# EAGLE board Sprite_Sail_60x60cm (EAGLE 9.0.0), part 1 of 2
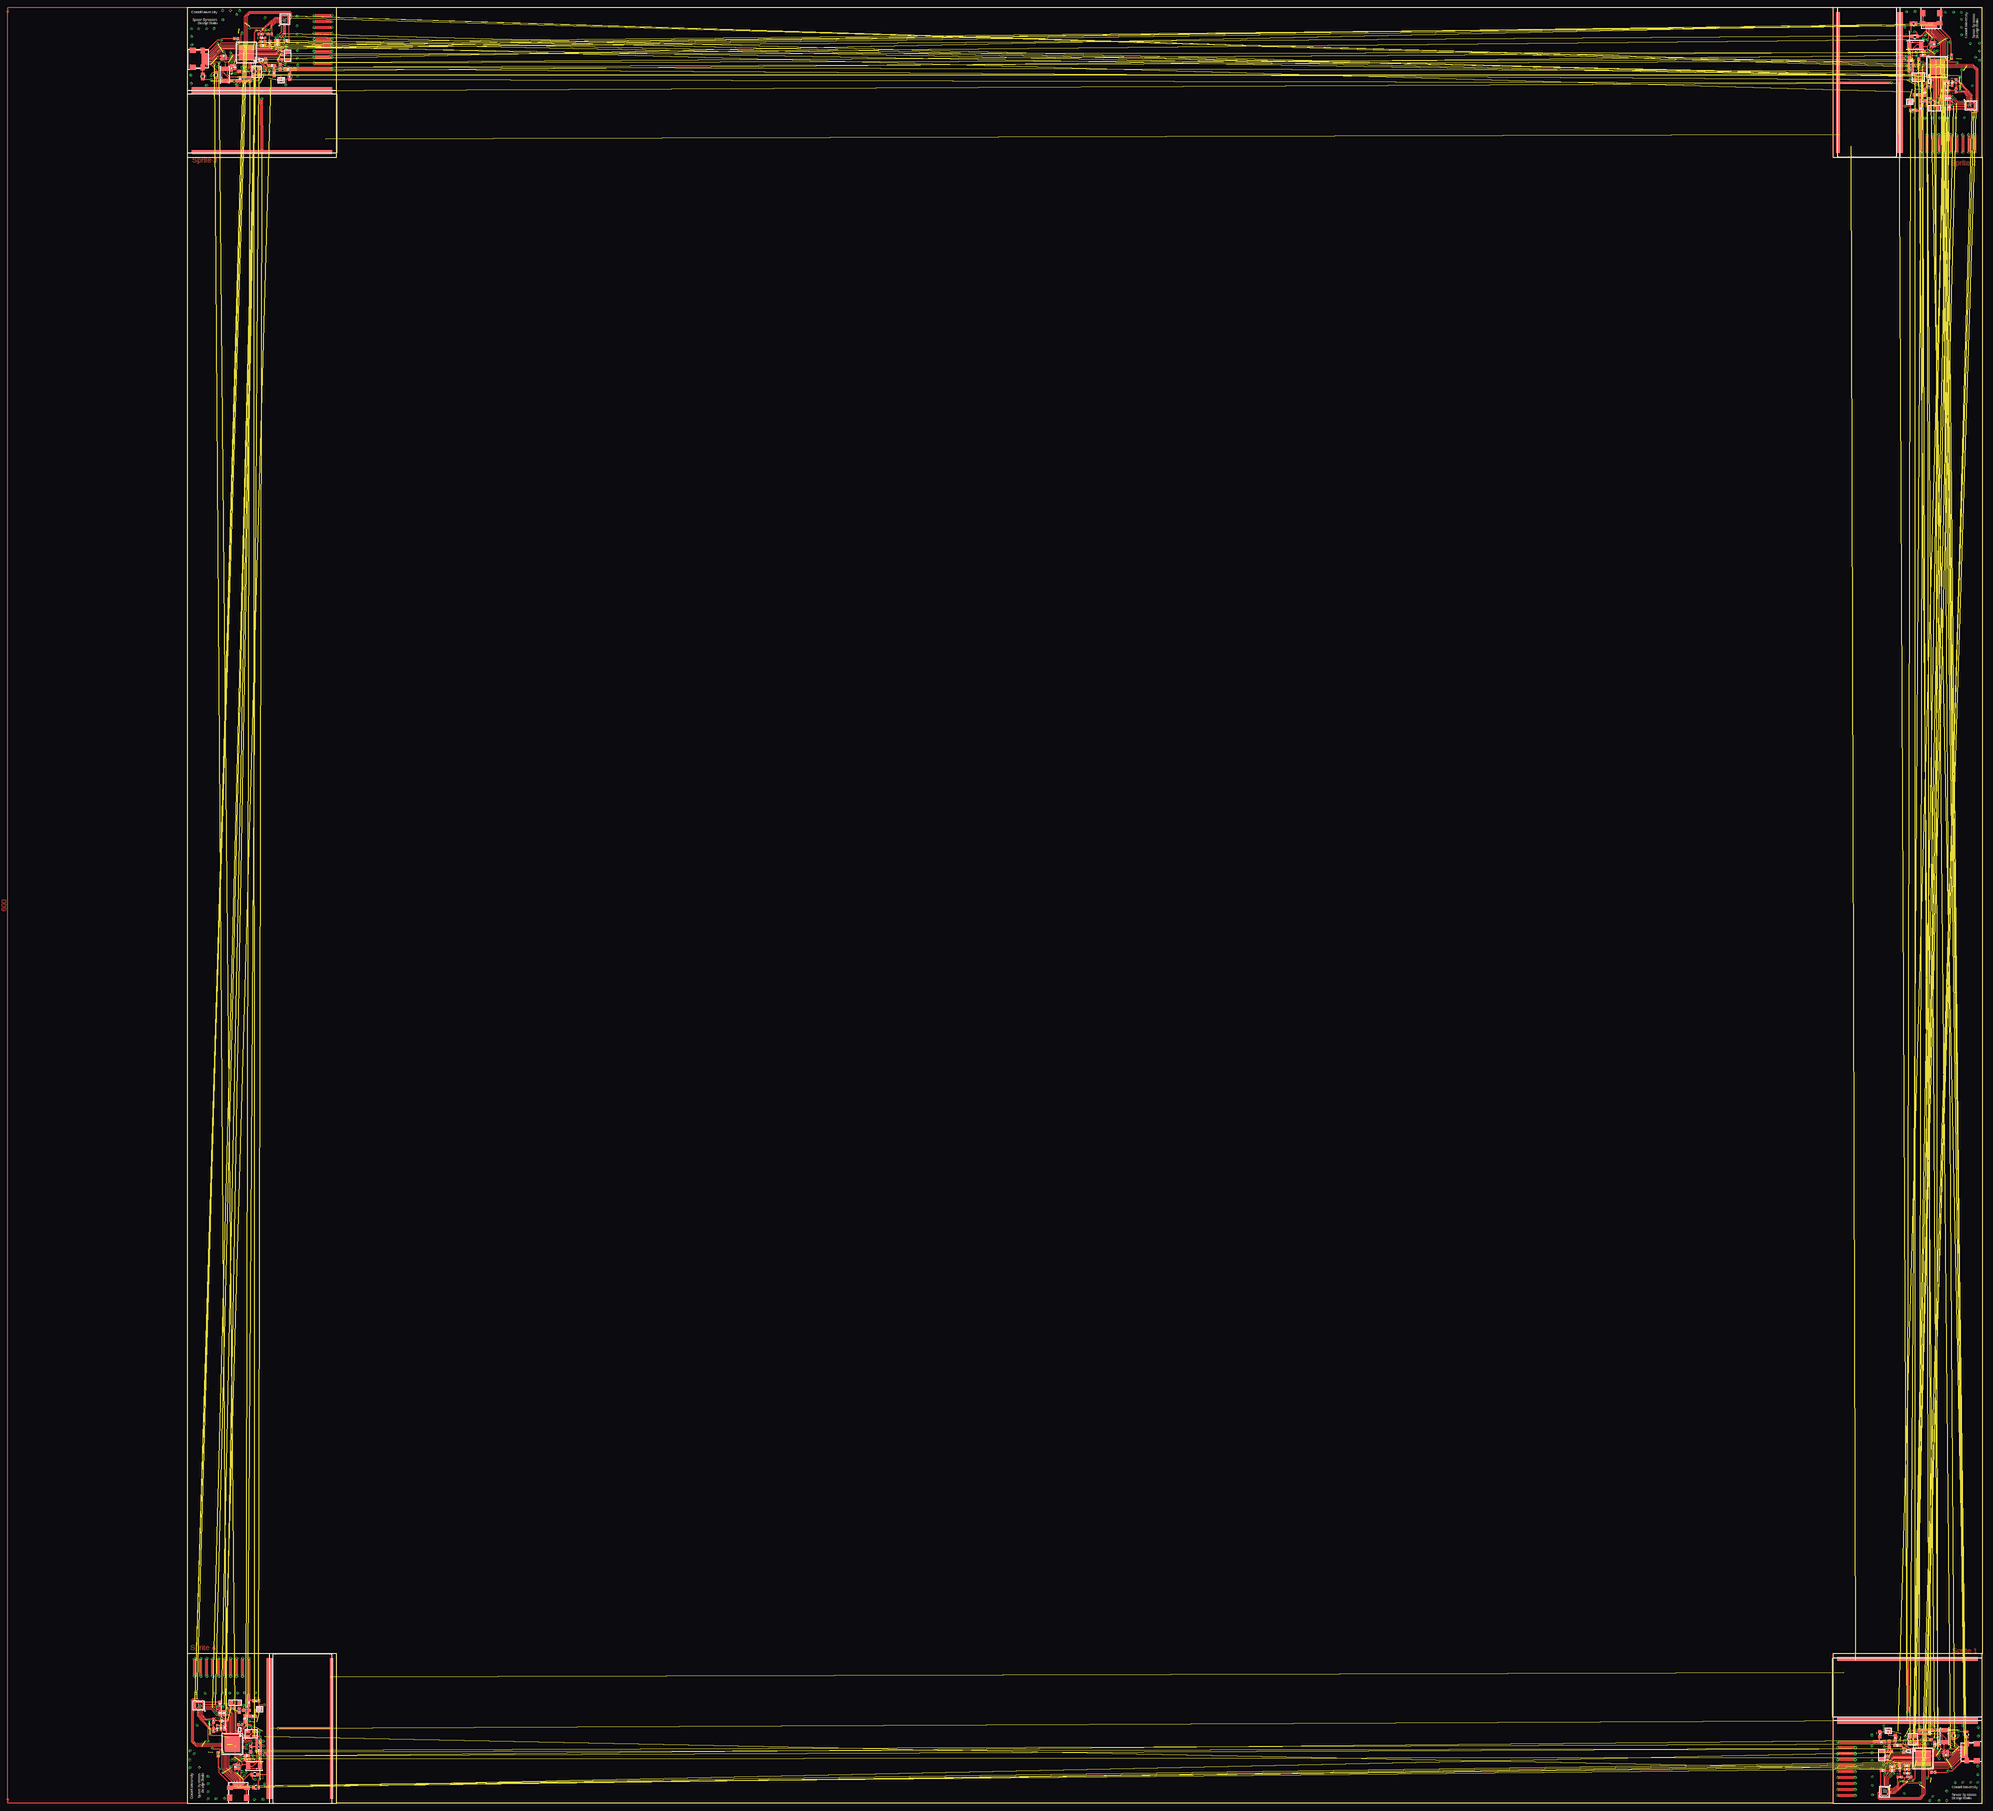
[diagram p0: board, top side]
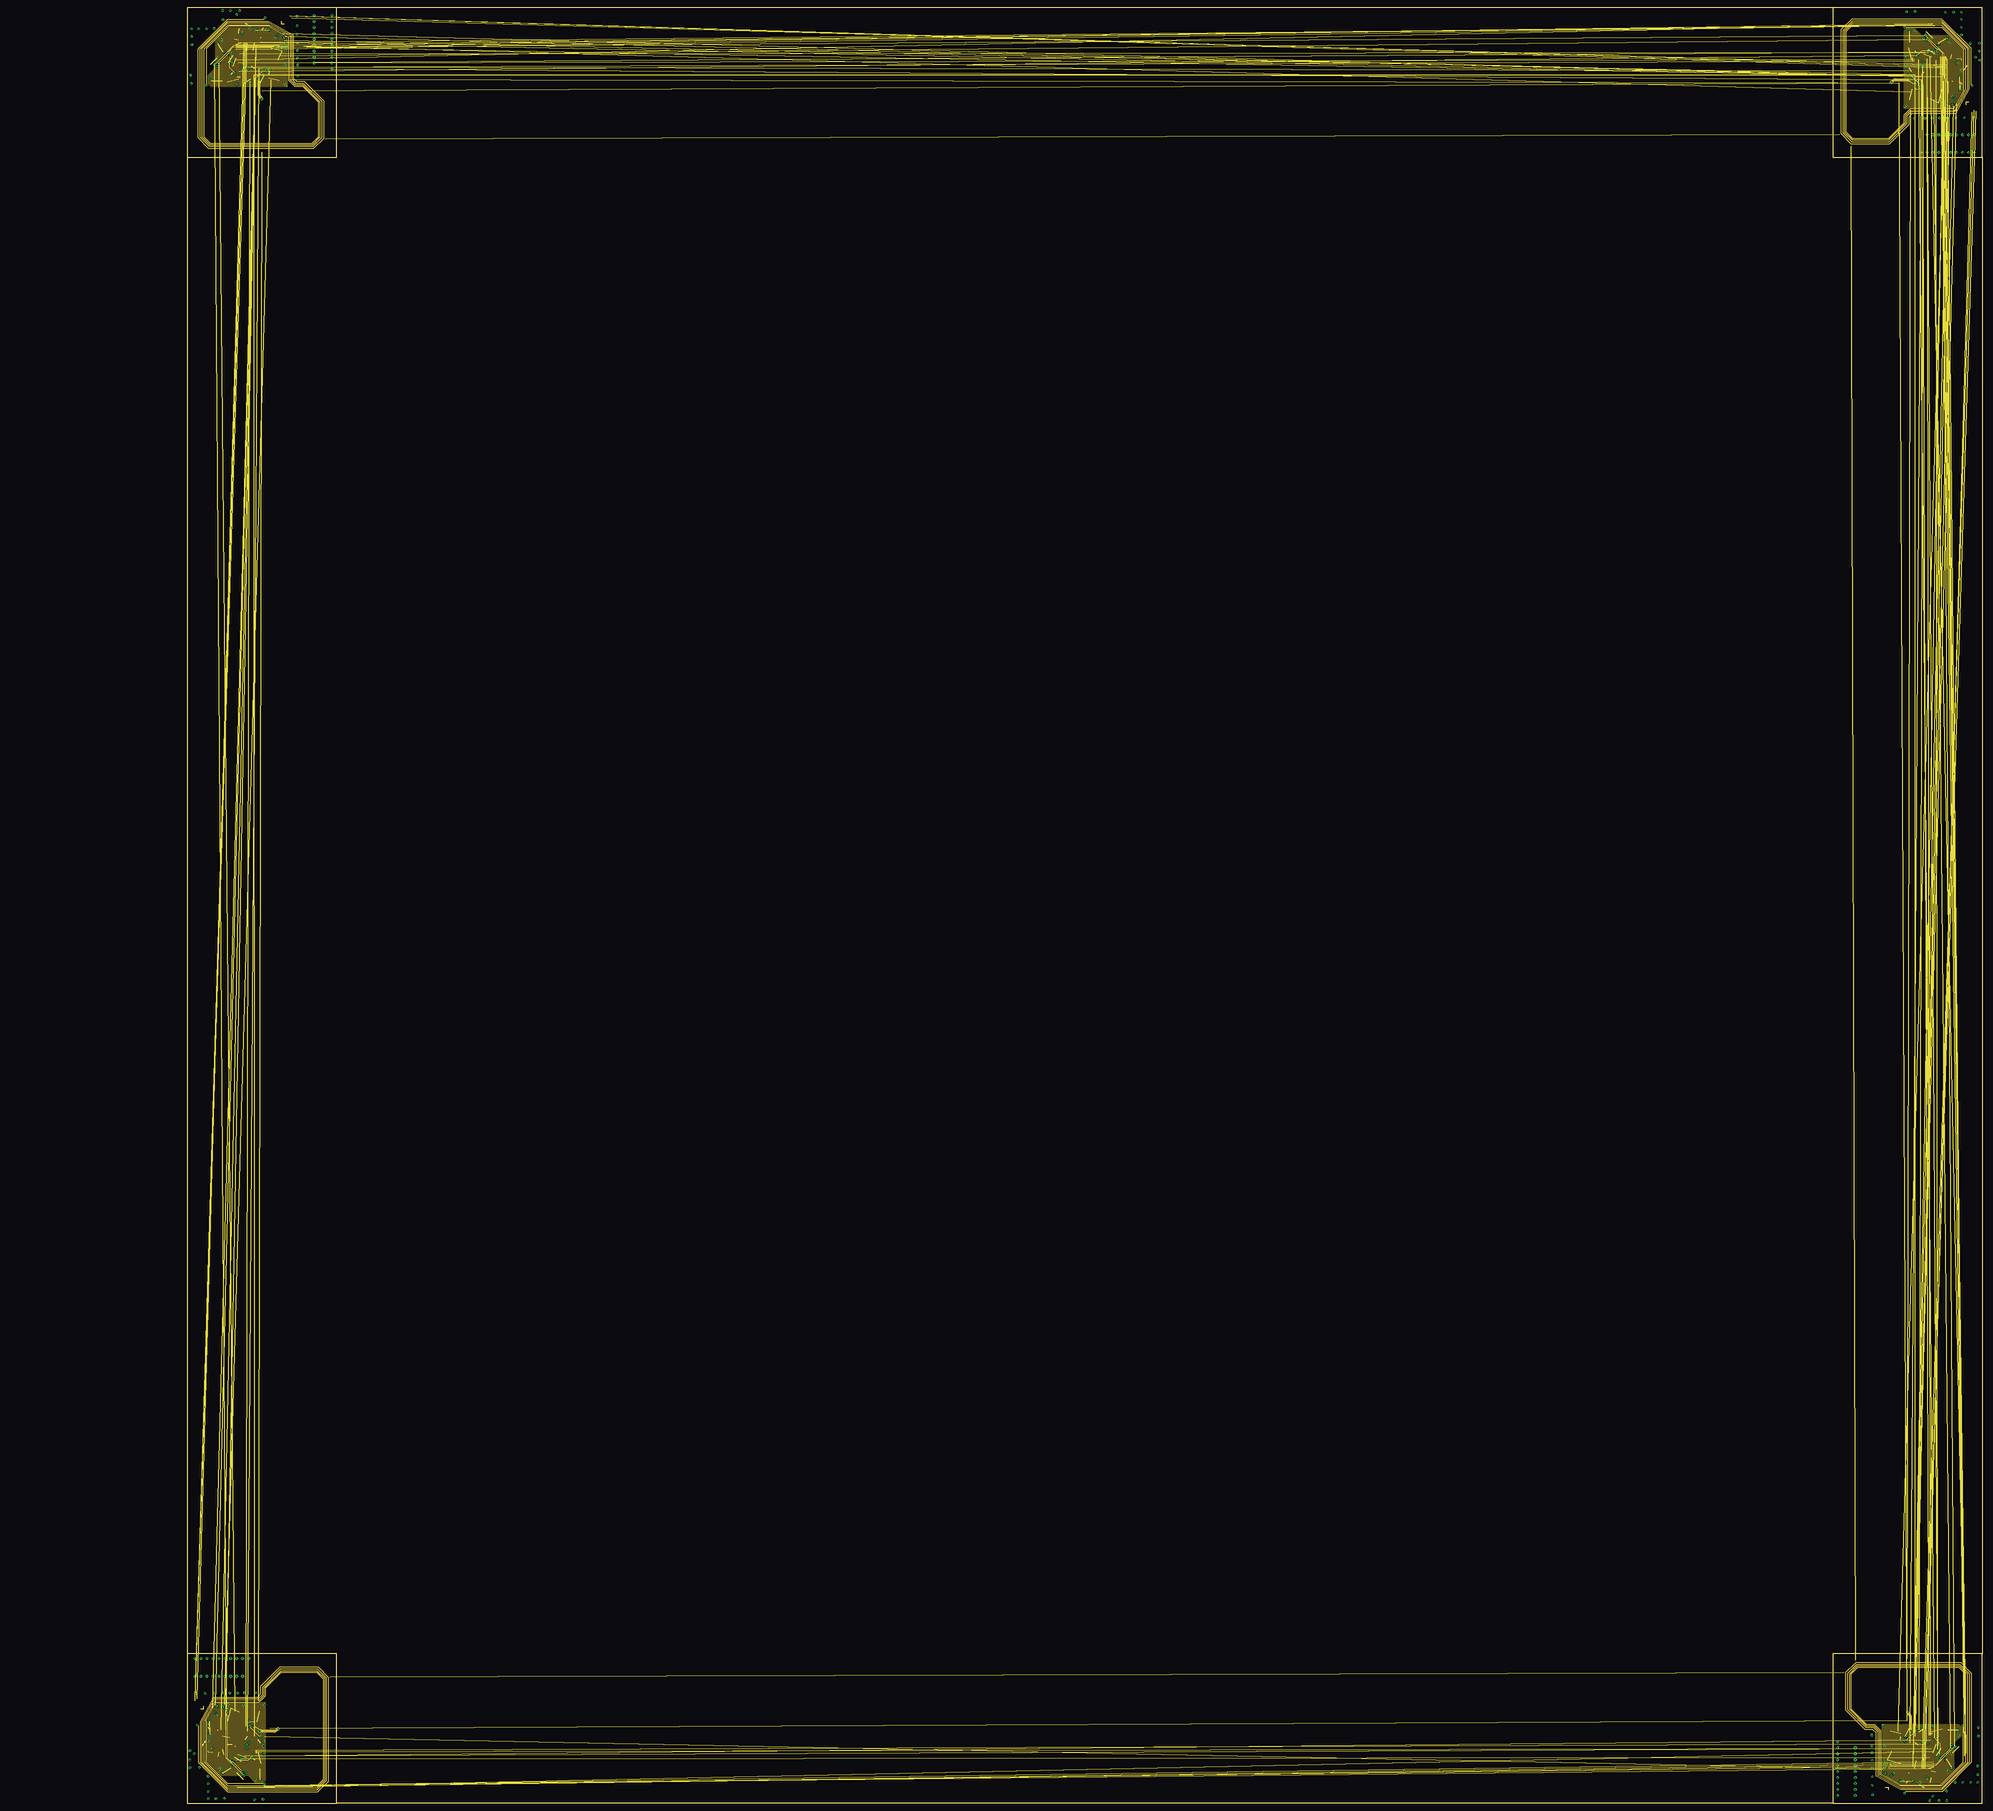
[diagram p1: board, inner layer Route2]
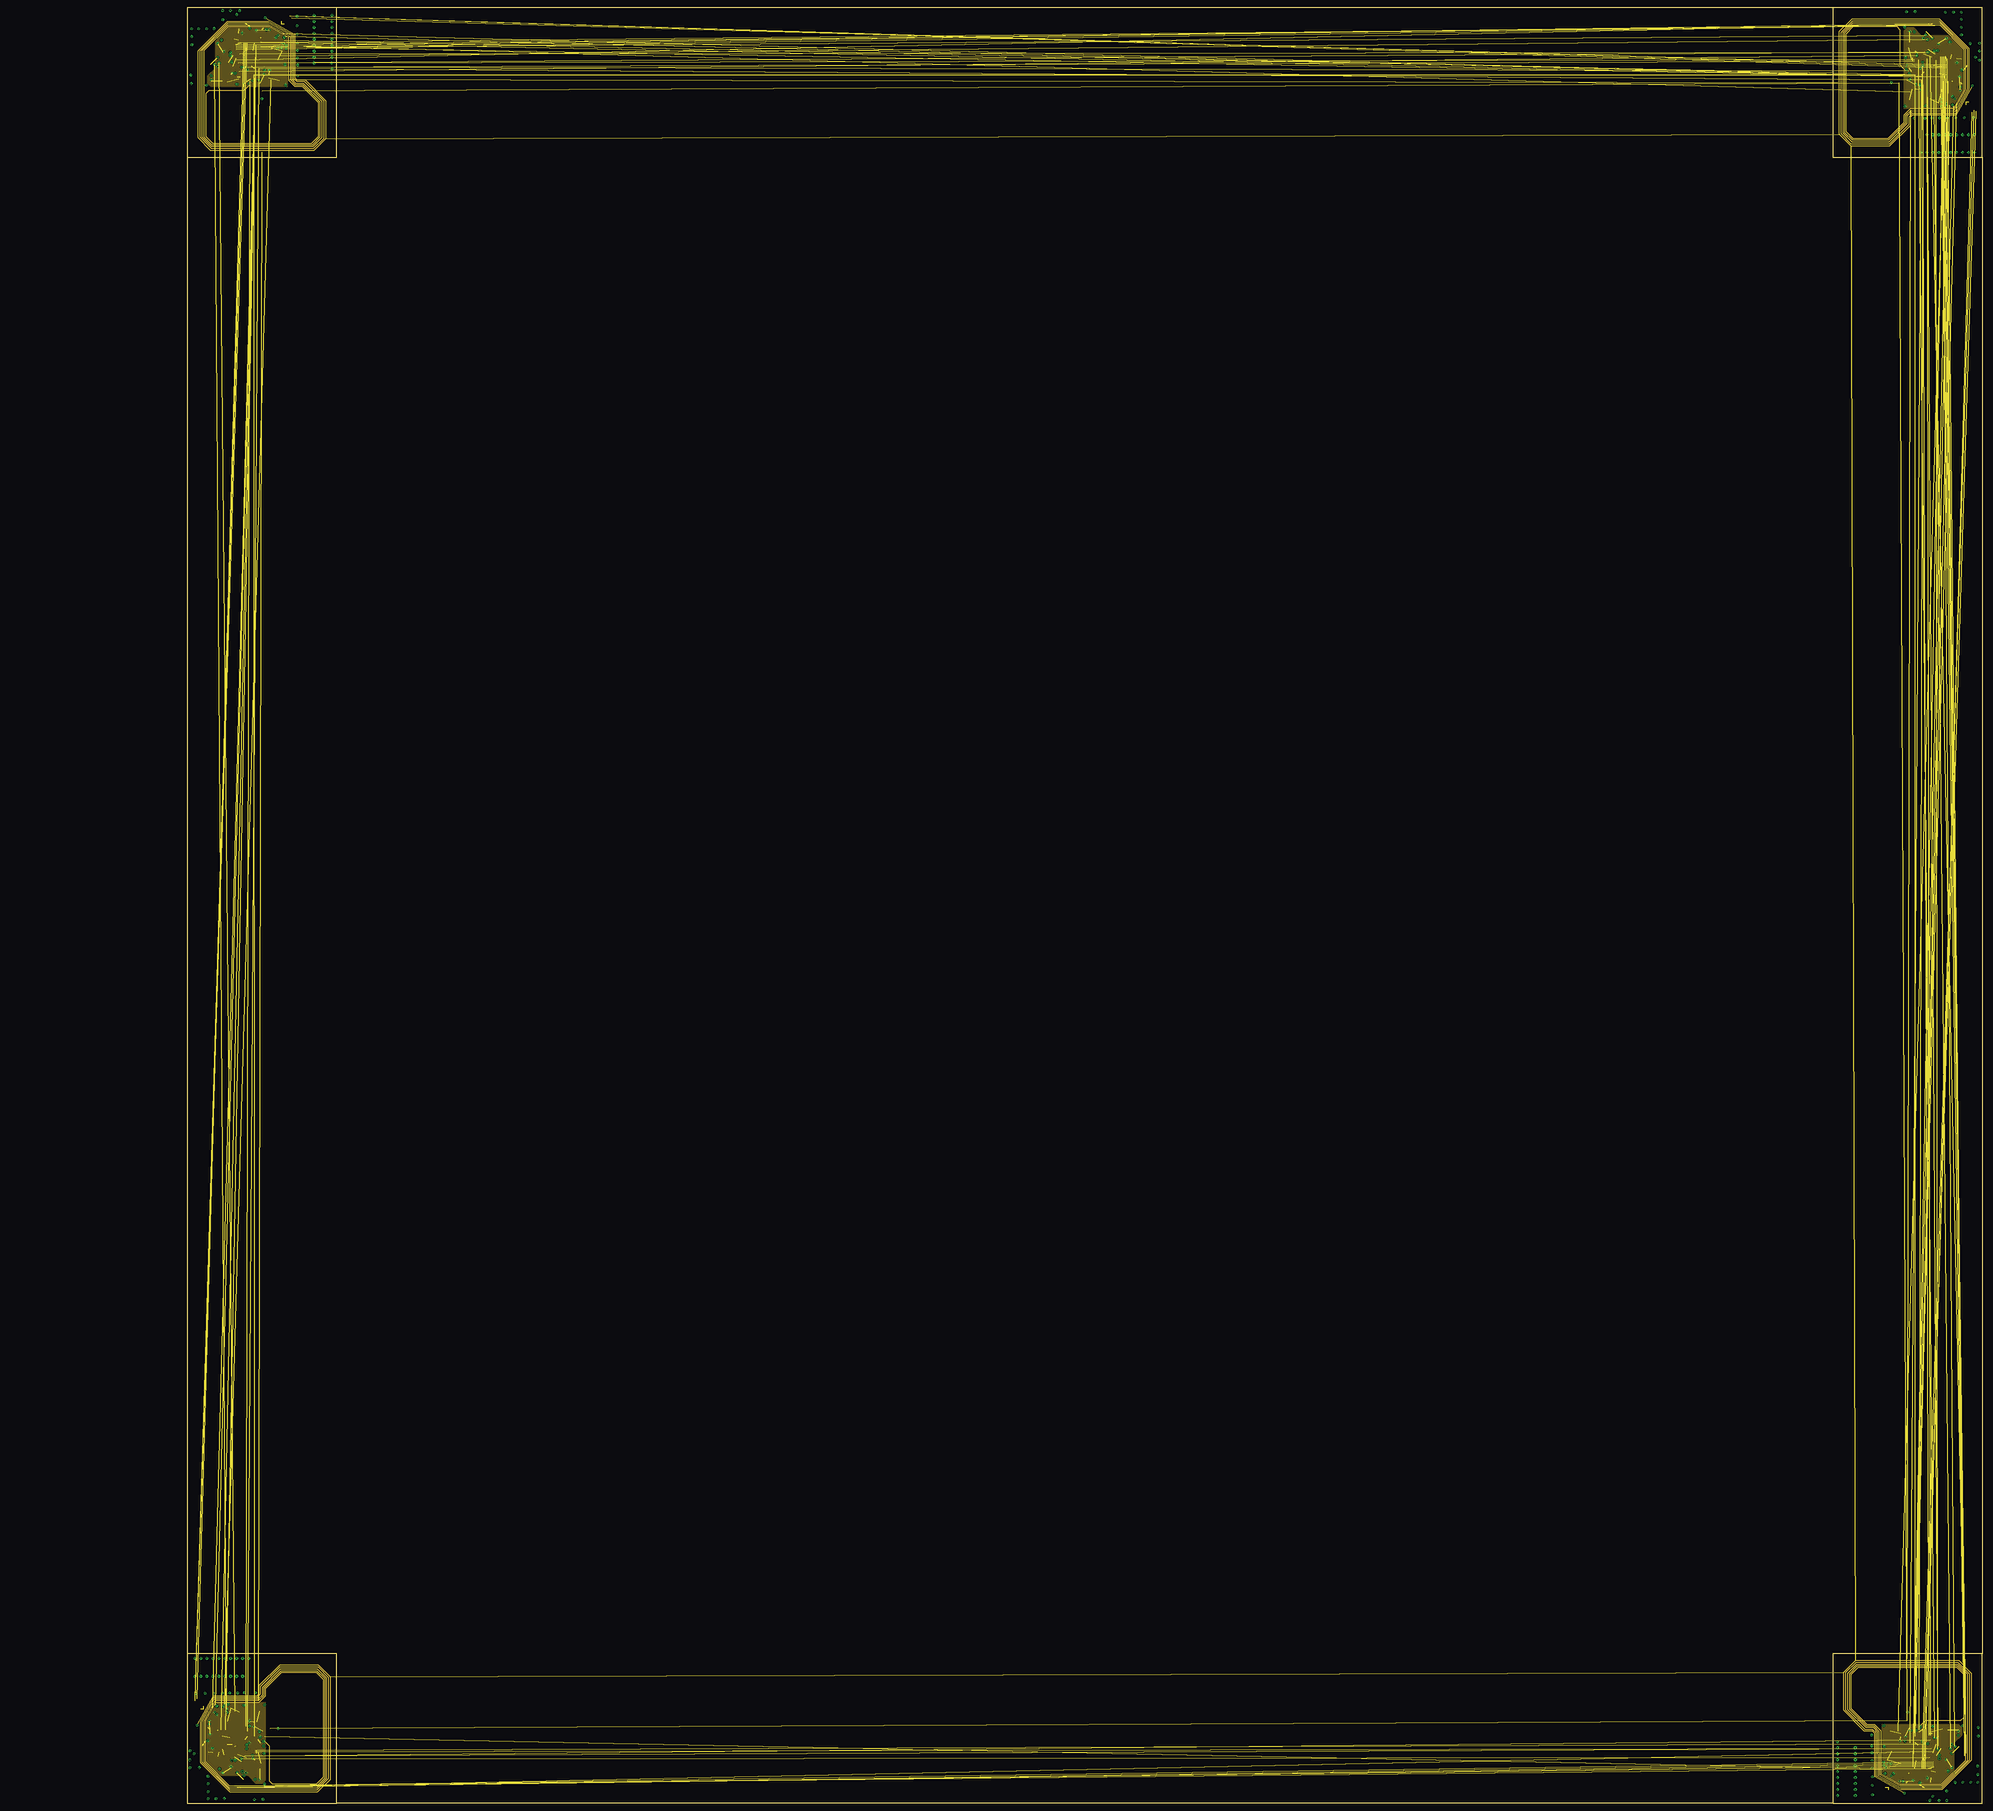
[diagram p2: board, inner layer Route15]
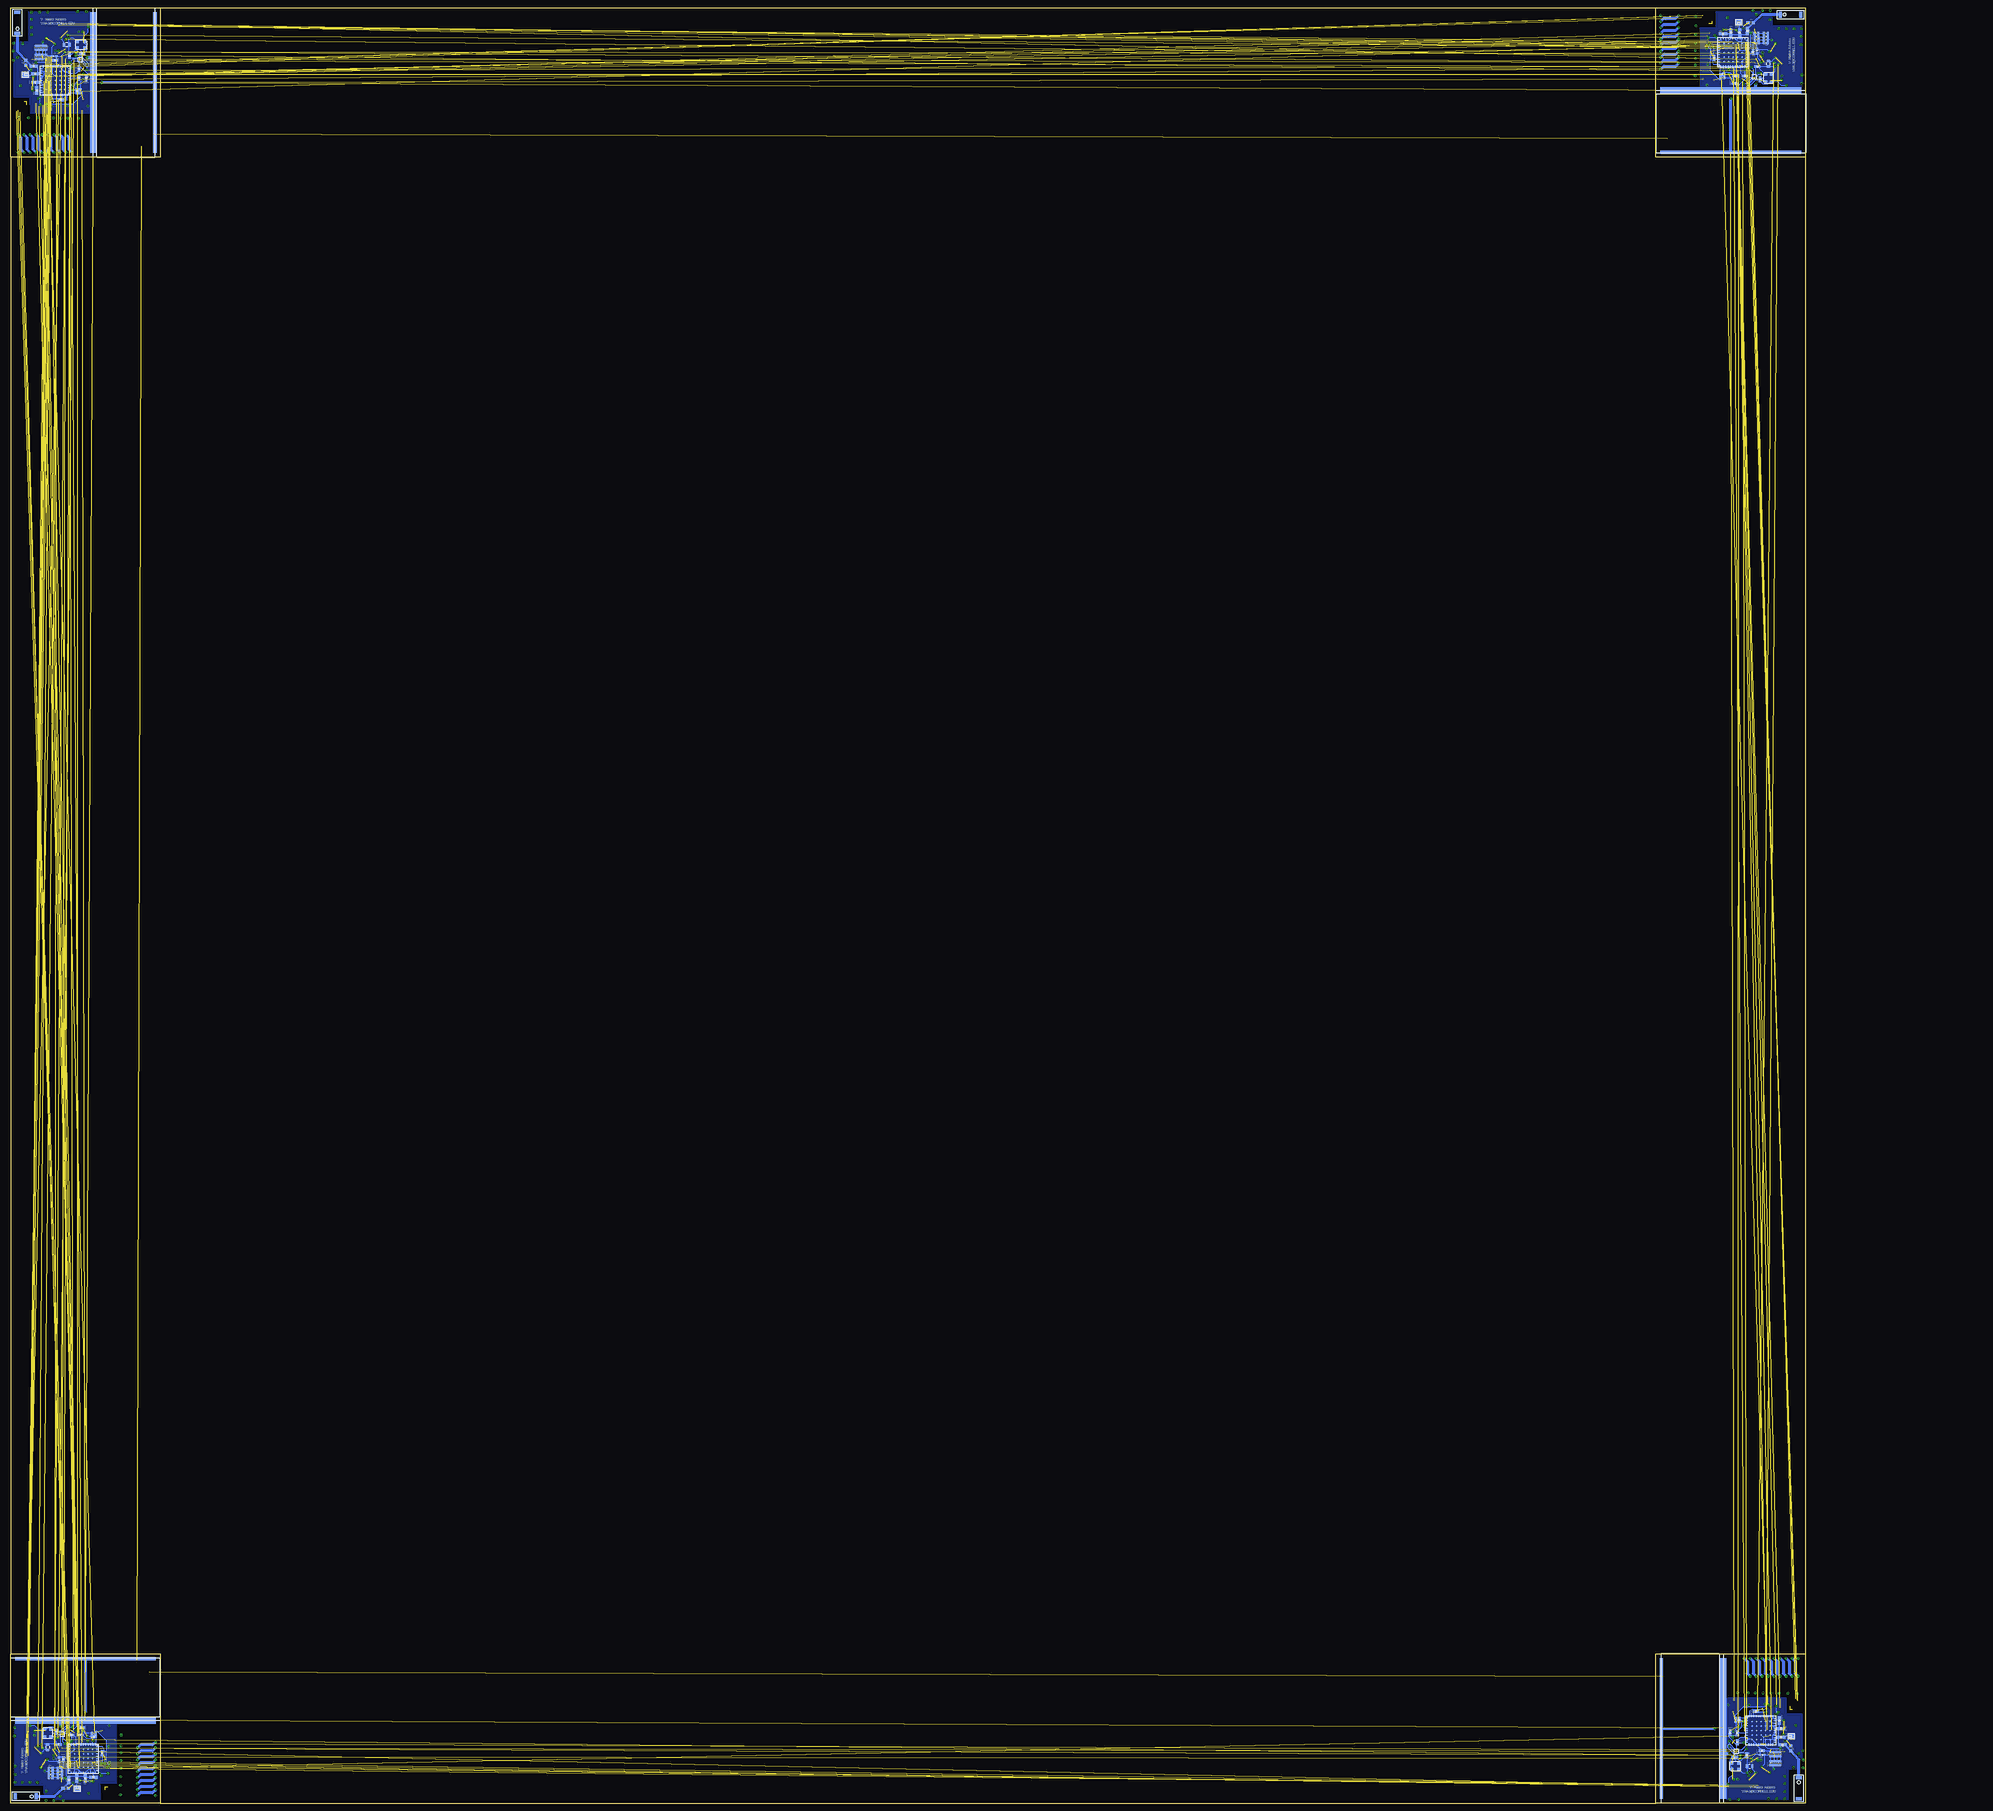
[diagram p3: board, bottom side, seen from below]

Size 600 x 600 mm. Coordinates in mm from the lower left corner, seen from the top.
Outline: 550,600 50,600
Outline: 0,550 0,50
Outline: 550,0 50,0
Outline: 600,550 600,50
Outline: 550,0 600,0 600,50
Outline: 600,50 550,50 550,0
Outline: 600,550 600,600 550,600
Outline: 550,600 550,550 600,550
Outline: 50,600 0,600 0,550
Outline: 0,550 50,550 50,600
Outline: 0,50 0,0 50,0
Outline: 50,0 50,50 0,50
Copper layers (1*16): Top 0.035mm / dielectric 1.5mm / Bottom 0.035mm
Design rules "default": minimum track width 6mil, minimum drill 0.35mm, track to track 6mil, track to pad 6mil, pad to pad 6mil, via to via 6mil, smd to smd 6mil, copper to edge 40mil, drill to drill 6mil, minimum pad ring 10mil, minimum via ring 8mil, stop-mask expansion 4mil, vias tented up to drill 0mil, thermal gap 10mil

## Footprints (pad centres in the part's own frame; a part is rotated, then mirrored left to right if it is on the bottom)
FC-135 = smd 1 x 1.8: P1 -1.25,0; P2 1.25,0
JOHANSON_BALUN = smd 0.45 x 0.25: 1 -0.4,0.5; 2 -0.4,0; 3 -0.4,-0.5; 4 0.4,-0.5; 5 0.4,0; 6 0.4,0.5
0402-CAP = smd 0.7 x 0.9: 1 -0.65,0; 2 0.65,0
0603-CAP = smd 1.1 x 1: 1 -0.85,0; 2 0.85,0
0805 = smd 0.8 x 1.2: 1 -0.9,0; 2 0.9,0
ALTA_CELL = smd 47 x 2.2: + 0,10.9 | smd 47 x 1.1: - 0,-9.65
VENUS838FLPX = smd 0.7 x 0.36: 1 -4.69,4; 2 -4.69,3.2; 3 -4.69,2.4; 4 -4.69,1.6; 5 -4.69,0.8; 6 -4.69,0; 7 -4.69,-0.8; 8 -4.69,-1.6; 9 -4.69,-2.4; 10 -4.69,-3.2; 11 -4.69,-4; 23 4.69,-4; 24 4.69,-3.2; 25 4.69,-2.4; 26 4.69,-1.6; 27 4.69,-0.8; 28 4.69,0; 29 4.69,0.8; 30 4.69,1.6; 31 4.69,2.4; 32 4.69,3.2; 33 4.69,4 | smd 0.36 x 0.7: 12 -4,-4.69; 13 -3.2,-4.69; 14 -2.4,-4.69; 15 -1.6,-4.69; 16 -0.8,-4.69; 17 0,-4.69; 18 0.8,-4.69; 19 1.6,-4.69; 20 2.4,-4.69; 21 3.2,-4.69; 22 4,-4.69; 34 4,4.69; 35 3.2,4.69; 36 2.4,4.69; 37 1.6,4.69; 38 0.8,4.69; 39 0,4.69; 40 -0.8,4.69; 41 -1.6,4.69; 42 -2.4,4.69; 43 -3.2,4.69; 44 -4,4.69 | smd 0.6 x 0.6: 45 -3,3; 46 -3,1.5; 47 -3,0; 48 -3,-1.5; 49 -3,-3; 50 -1.5,3; 51 -1.5,1.5; 52 -1.5,0; 53 -1.5,-1.5; 54 -1.5,-3; 55 0,3; 56 0,1.5; 57 0,0; 58 0,-1.5; 59 0,-3; 60 1.5,3; 61 1.5,1.5; 62 1.5,0; 63 1.5,-1.5; 64 1.5,-3; 65 3,3; 66 3,1.5; 67 3,0; 68 3,-1.5; 69 3,-3
LGA24-8X4 = smd 0.27 x 0.45: 1 -1.505,1.225; 6 -1.505,-1.225; 7 -1.075,-1.225; 8 -0.645,-1.225; 9 -0.215,-1.225; 10 0.215,-1.225; 11 0.645,-1.225; 12 1.075,-1.225; 13 1.505,-1.225; 18 1.505,1.225; 19 1.075,1.225; 20 0.645,1.225; 21 0.215,1.225; 22 -0.215,1.225; 23 -0.645,1.225; 24 -1.075,1.225 | smd 0.45 x 0.27: 2 -1.475,0.645; 3 -1.475,0.215; 4 -1.475,-0.215; 5 -1.475,-0.645; 14 1.475,-0.645; 15 1.475,-0.215; 16 1.475,0.215; 17 1.475,0.645
0603 = smd 1.1 x 1: 1 -0.85,0; 2 0.85,0
LED-0603 = smd 0.8 x 0.8: A 0,-0.75; C 0,0.75
ALS-PT19 = smd 0.8 x 0.8: C -0.75,0; E 0.75,0
CC1310 = smd 0.7 x 0.3: 1 -3.35,2.75; 2 -3.35,2.25; 3 -3.35,1.75; 4 -3.35,1.25; 5 -3.35,0.75; 6 -3.35,0.25; 7 -3.35,-0.25; 8 -3.35,-0.75; 9 -3.35,-1.25; 10 -3.35,-1.75; 11 -3.35,-2.25; 12 -3.35,-2.75; 25 3.35,-2.75; 26 3.35,-2.25; 27 3.35,-1.75; 28 3.35,-1.25; 29 3.35,-0.75; 30 3.35,-0.25; 31 3.35,0.25; 32 3.35,0.75; 33 3.35,1.25; 34 3.35,1.75; 35 3.35,2.25; 36 3.35,2.75 | smd 0.3 x 0.7: 13 -2.75,-3.35; 14 -2.25,-3.35; 15 -1.75,-3.35; 16 -1.25,-3.35; 17 -0.75,-3.35; 18 -0.25,-3.35; 19 0.25,-3.35; 20 0.75,-3.35; 21 1.25,-3.35; 22 1.75,-3.35; 23 2.25,-3.35; 24 2.75,-3.35; 37 2.75,3.35; 38 2.25,3.35; 39 1.75,3.35; 40 1.25,3.35; 41 0.75,3.35; 42 0.25,3.35; 43 -0.25,3.35; 44 -0.75,3.35; 45 -1.25,3.35; 46 -1.75,3.35; 47 -2.25,3.35; 48 -2.75,3.35 | smd 5.15 x 5.15: 49 0,0
0402-RES = smd 0.7 x 0.9: 1 -0.65,0; 2 0.65,0
0603-RES = smd 1.1 x 1: 1 -0.85,0; 2 0.85,0
TSX-3225 = smd 1.4 x 1.15: 1 -1.1,0.8; 2 1.1,0.8; 3 1.1,-0.8; 4 -1.1,-0.8
LV8417CS = smd 0.27 x 0.27: ENA -0.5,-0.5; IN1 0,-0.5; IN2 0.5,-0.5; OUT1 -0.5,0.5; OUT2 0.5,0.5; PGND 0,0.5; SGND 0,0; VCC -0.5,0; VM 0.5,0
JOHANSON_GPS_CHIP = smd 1 x 2: NC -3.5,0; SIG 3.5,0
PANASONIC_RECTIFIER = smd 1 x 1: C1 -0.95,1.2; C2 0.95,-1.2; GND 0.95,1.2; VCC -0.95,-1.2
PCB_ANTENNA = drill 0.35 pad 0.756: 1 -8.89,3.11; 2 -6.89,-2.89; 3 -6.89,3.11; 4 -4.89,-2.89; 5 -4.89,3.11; 6 -2.89,-2.89; 7 -2.89,3.11; 8 -0.89,-2.89; 9 -0.89,3.11; 10 1.11,-2.89; 11 1.11,3.11; 12 3.11,-2.89; 13 3.11,3.11; 14 5.11,-2.89; 15 5.11,3.11; 16 7.11,-2.89; 17 7.11,3.11; 18 9.11,-2.89; 19 9.11,3.11 | smd 1 x 1 bottom: ANTENNA -8.89,-9.39
MM5829-2700 = smd 0.4 x 1.7: GND1 -0.7,0; GND3 0.7,0 | smd 0.4 x 0.4: GND2 0,0.65 | smd 0.4 x 0.85: SIG 0,-0.425
L6920 = smd 0.45 x 1.35: 1 -0.975,-1.975; 2 -0.325,-1.975; 3 0.325,-1.975; 4 0.975,-1.975; 5 0.975,1.975; 6 0.325,1.975; 7 -0.325,1.975; 8 -0.975,1.975
HDMID = smd 0.23 x 0.85: 1 1.8,6.475; 3 1.4,6.475; 5 1,6.475; 7 0.6,6.475; 9 0.2,6.475; 11 -0.2,6.475; 13 -0.6,6.475; 15 -1,6.475; 17 -1.4,6.475; 19 -1.8,6.475 | smd 0.23 x 1: 2 1.6,5.25; 4 1.2,5.25; 6 0.8,5.25; 8 0.4,5.25; 10 0,5.25; 12 -0.4,5.25; 14 -0.8,5.25; 16 -1.2,5.25; 18 -1.6,5.25 | smd 1.8 x 1.38: FOOT1 -2.85,5.06; FOOT2 2.85,5.06 | smd 1.7 x 2: FOOT3 -2.85,1.7; FOOT4 2.85,1.7

## Placement (x,y rotation side)
32.1  FC-135  [FC-135]  566.41,16.05 90 top
32.2  FC-135  [FC-135]  33.59,583.95 270 top
32.3  FC-135  [FC-135]  583.95,566.41 180 top
32.5  FC-135  [FC-135]  16.05,33.59 0 top
BALUN1  JOHANSON_BALUN  [JOHANSON_BALUN]  575.37,17.48 90 top
BALUN2  JOHANSON_BALUN  [JOHANSON_BALUN]  24.63,582.52 270 top
BALUN3  JOHANSON_BALUN  [JOHANSON_BALUN]  582.52,575.37 180 top
BALUN5  JOHANSON_BALUN  [JOHANSON_BALUN]  17.48,24.63 0 top
C21  100 nF  [0402-CAP]  587.79,17.14 0 top
C24  100 nF  [0402-CAP]  586.67,11.72 180 bottom
C25  100 nF  [0402-CAP]  586.68,10.64 180 bottom
C27  100 nF  [0402-CAP]  586.69,9.56 180 bottom
C28  100 nF  [0402-CAP]  586.69,8.49 180 bottom
C29  22 uF  [0402-CAP]  583.64,11.73 0 bottom
C30  100 nF  [0402-CAP]  581.13,23.81 90 top
C31  22 uF  [0402-CAP]  580.04,23.8 90 top
C32  100 nF  [0402-CAP]  578.97,23.8 270 top
C33  1 uF  [0402-CAP]  583.68,10.29 0 top
C34  12 pF  [0402-CAP]  569.05,17.32 0 top
C35  12 pF  [0402-CAP]  568.31,15.1 270 top
C36  10 uF  [0402-CAP]  583.63,10.64 0 bottom
C37  0.1 uF  [0402-CAP]  583.62,9.57 0 bottom
C38  0.1 uF  [0402-CAP]  583.61,8.49 0 bottom
C39  10 nF  [0402-CAP]  575.56,8.71 180 top
C40  0.1 uF  [0402-CAP]  572.42,8.74 0 top
C41  0.1 uF  [0402-CAP]  572.19,23.35 180 bottom
C42  100 pF  [0402-CAP]  573.79,17.74 270 top
C43  100pF  [0603-CAP]  565.85,23.03 270 top
C44  100 uF  [0805]  587.68,18.69 270 bottom
C45  47 uF  [0805]  590.41,22.51 270 top
C46  47 uF  [0805]  594.83,22.94 270 top
C47  100 nF  [0402-CAP]  12.21,582.86 180 top
C48  100 nF  [0402-CAP]  13.33,588.28 0 bottom
C49  100 nF  [0402-CAP]  13.32,589.36 0 bottom
C50  100 nF  [0402-CAP]  13.31,590.44 0 bottom
C51  100 nF  [0402-CAP]  13.31,591.51 0 bottom
C52  22 uF  [0402-CAP]  16.36,588.27 180 bottom
C53  100 nF  [0402-CAP]  18.87,576.19 270 top
C54  22 uF  [0402-CAP]  19.96,576.2 270 top
C55  100 nF  [0402-CAP]  21.03,576.2 90 top
C56  1 uF  [0402-CAP]  16.32,589.71 180 top
C57  12 pF  [0402-CAP]  30.95,582.68 180 top
C58  12 pF  [0402-CAP]  31.69,584.9 90 top
C59  10 uF  [0402-CAP]  16.37,589.36 180 bottom
C60  0.1 uF  [0402-CAP]  16.38,590.43 180 bottom
C61  0.1 uF  [0402-CAP]  16.39,591.51 180 bottom
C62  10 nF  [0402-CAP]  24.44,591.29 0 top
C63  0.1 uF  [0402-CAP]  27.58,591.26 180 top
C64  0.1 uF  [0402-CAP]  27.81,576.65 0 bottom
C65  100 pF  [0402-CAP]  26.21,582.26 90 top
C66  100pF  [0603-CAP]  34.15,576.97 90 top
C67  100 uF  [0805]  12.32,581.31 90 bottom
C68  47 uF  [0805]  9.59,577.49 90 top
C69  47 uF  [0805]  5.17,577.06 90 top
C70  100 nF  [0402-CAP]  582.86,587.79 90 top
C71  100 nF  [0402-CAP]  588.28,586.67 90 bottom
C72  100 nF  [0402-CAP]  589.36,586.68 90 bottom
C73  100 nF  [0402-CAP]  590.44,586.69 90 bottom
C74  100 nF  [0402-CAP]  591.51,586.69 90 bottom
C75  22 uF  [0402-CAP]  588.27,583.64 270 bottom
C76  100 nF  [0402-CAP]  576.19,581.13 180 top
C77  22 uF  [0402-CAP]  576.2,580.04 180 top
C78  100 nF  [0402-CAP]  576.2,578.97 0 top
C79  1 uF  [0402-CAP]  589.71,583.68 90 top
C80  12 pF  [0402-CAP]  582.68,569.05 90 top
C81  12 pF  [0402-CAP]  584.9,568.31 0 top
C82  10 uF  [0402-CAP]  589.36,583.63 270 bottom
C83  0.1 uF  [0402-CAP]  590.43,583.62 270 bottom
C84  0.1 uF  [0402-CAP]  591.51,583.61 270 bottom
C85  10 nF  [0402-CAP]  591.29,575.56 270 top
C86  0.1 uF  [0402-CAP]  591.26,572.42 90 top
C87  0.1 uF  [0402-CAP]  576.65,572.19 90 bottom
C88  100 pF  [0402-CAP]  582.26,573.79 0 top
C89  100pF  [0603-CAP]  576.97,565.85 0 top
C90  100 uF  [0805]  581.31,587.68 180 bottom
C91  47 uF  [0805]  577.49,590.41 0 top
C92  47 uF  [0805]  577.06,594.83 0 top
C116  100 nF  [0402-CAP]  17.14,12.21 270 top
C117  100 nF  [0402-CAP]  11.72,13.33 270 bottom
C118  100 nF  [0402-CAP]  10.64,13.32 270 bottom
C119  100 nF  [0402-CAP]  9.56,13.31 270 bottom
C120  100 nF  [0402-CAP]  8.49,13.31 270 bottom
C121  22 uF  [0402-CAP]  11.73,16.36 90 bottom
C122  100 nF  [0402-CAP]  23.81,18.87 0 top
C123  22 uF  [0402-CAP]  23.8,19.96 0 top
C124  100 nF  [0402-CAP]  23.8,21.03 180 top
C125  1 uF  [0402-CAP]  10.29,16.32 270 top
C126  12 pF  [0402-CAP]  17.32,30.95 270 top
C127  12 pF  [0402-CAP]  15.1,31.69 180 top
C128  10 uF  [0402-CAP]  10.64,16.37 90 bottom
C129  0.1 uF  [0402-CAP]  9.57,16.38 90 bottom
C130  0.1 uF  [0402-CAP]  8.49,16.39 90 bottom
C131  10 nF  [0402-CAP]  8.71,24.44 90 top
C132  0.1 uF  [0402-CAP]  8.74,27.58 270 top
C133  0.1 uF  [0402-CAP]  23.35,27.81 270 bottom
C134  100 pF  [0402-CAP]  17.74,26.21 180 top
C135  100pF  [0603-CAP]  23.03,34.15 180 top
C136  100 uF  [0805]  18.69,12.32 0 bottom
C137  47 uF  [0805]  22.51,9.59 180 top
C138  47 uF  [0805]  22.94,5.17 180 top
FRONT_PANEL1  ALTA_CELL  [ALTA_CELL]  575.03,38.57 180 bottom
FRONT_PANEL2  ALTA_CELL  [ALTA_CELL]  24.97,561.43 0 bottom
FRONT_PANEL3  ALTA_CELL  [ALTA_CELL]  561.43,575.03 90 bottom
FRONT_PANEL5  ALTA_CELL  [ALTA_CELL]  38.57,24.97 270 bottom
GPS1  VENUS838FLPX  [VENUS838FLPX]  575.72,14.89 270 bottom
GPS2  VENUS838FLPX  [VENUS838FLPX]  24.28,585.11 90 bottom
GPS3  VENUS838FLPX  [VENUS838FLPX]  585.11,575.72 180 bottom
GPS5  VENUS838FLPX  [VENUS838FLPX]  14.89,24.28 0 bottom
IMU1  LSM9DS1  [LGA24-8X4]  567.4,3.83 270 top
IMU2  LSM9DS1  [LGA24-8X4]  32.6,596.17 90 top
IMU3  LSM9DS1  [LGA24-8X4]  596.17,567.4 0 top
IMU5  LSM9DS1  [LGA24-8X4]  3.83,32.6 180 top
L5  6.8 uH  [0603]  581.86,21.19 180 top
L6  DNP  [0603]  568.93,19.73 270 top
L7  2.2 nH  [0603]  581.66,4.99 180 bottom
L8  47uH  [0603]  584.3,24.28 180 top
L9  6.8 uH  [0603]  18.14,578.81 0 top
L10  DNP  [0603]  31.07,580.27 90 top
L11  2.2 nH  [0603]  18.34,595.01 0 bottom
L12  47uH  [0603]  15.7,575.72 0 top
L13  6.8 uH  [0603]  578.81,581.86 270 top
L14  DNP  [0603]  580.27,568.93 0 top
L15  2.2 nH  [0603]  595.01,581.66 90 bottom
L16  47uH  [0603]  575.72,584.3 270 top
L21  6.8 uH  [0603]  21.19,18.14 90 top
L22  DNP  [0603]  19.73,31.07 180 top
L23  2.2 nH  [0603]  4.99,18.34 270 bottom
L24  47uH  [0603]  24.28,15.7 90 top
LED4  RED  [LED-0603]  572.48,11.86 180 top
LED5  GREEN  [LED-0603]  574.74,9.99 270 top
LED6  BLUE  [LED-0603]  576.49,25.22 90 bottom
LED7  RED  [LED-0603]  27.52,588.14 0 top
LED8  GREEN  [LED-0603]  25.26,590.01 90 top
LED9  BLUE  [LED-0603]  23.51,574.78 270 bottom
LED10  RED  [LED-0603]  588.14,572.48 270 top
LED11  GREEN  [LED-0603]  590.01,574.74 0 top
LED12  BLUE  [LED-0603]  574.78,576.49 0 bottom
LED16  RED  [LED-0603]  11.86,27.52 90 top
LED17  GREEN  [LED-0603]  9.99,25.26 180 top
LED18  BLUE  [LED-0603]  25.22,23.51 180 bottom
LS3  LIGHTSENSORALS  [ALS-PT19]  583.82,14.54 90 bottom
LS4  LIGHTSENSORALS  [ALS-PT19]  585.32,19.95 270 top
LS5  LIGHTSENSORALS  [ALS-PT19]  16.18,585.46 270 bottom
LS6  LIGHTSENSORALS  [ALS-PT19]  14.68,580.05 90 top
LS7  LIGHTSENSORALS  [ALS-PT19]  585.46,583.82 0 bottom
LS8  LIGHTSENSORALS  [ALS-PT19]  580.05,585.32 0 top
LS11  LIGHTSENSORALS  [ALS-PT19]  14.54,16.18 180 bottom
LS12  LIGHTSENSORALS  [ALS-PT19]  19.95,14.68 180 top
MICROCONTROLLER1  CC1310  [CC1310]  580.26,15.01 0 top
MICROCONTROLLER2  CC1310  [CC1310]  19.74,584.99 180 top
MICROCONTROLLER3  CC1310  [CC1310]  584.99,580.26 90 top
MICROCONTROLLER5  CC1310  [CC1310]  15.01,19.74 270 top
R23  100k  [0402-RES]  587.81,16.04 180 top
R24  3.3k  [0402-RES]  569.9,12.21 180 top
R25  3.3k  [0402-RES]  569.89,10.91 180 top
R26  180  [0402-RES]  574.75,12.48 0 top
R27  180  [0402-RES]  574.78,11.27 0 top
R28  10k  [0402-RES]  566.82,10.9 180 top
R29  10k  [0402-RES]  582.47,14.66 270 bottom
R30  10k  [0402-RES]  584.11,19.84 90 top
R31  10k  [0402-RES]  569.4,16.65 270 bottom
R32  180  [0402-RES]  576.6,22.8 180 bottom
R33  1k  [0402-RES]  579.7,22.79 180 bottom
R34  10k  [0402-RES]  572.19,22.22 0 bottom
R35  3.3k  [0402-RES]  583.93,19.64 180 bottom
R36  331  [0402-RES]  584.82,23.84 90 bottom
R37  0  [0603-RES]  571.76,19.28 180 top
R38  0  [0603-RES]  572.39,8.72 0 bottom
R39  0  [0603-RES]  566.32,20.51 180 top
R40  0  [0603-RES]  580.54,7.67 90 bottom
R41  DNP  [0603-RES]  575.08,8.2 270 bottom
R42  10k  [0402-RES]  582.27,23.8 90 top
R43  0  [0603-RES]  570.98,21.84 270 top
R44  0  [0603-RES]  577.95,8.19 270 bottom
R45  100k  [0402-RES]  12.19,583.96 0 top
R46  3.3k  [0402-RES]  30.1,587.79 0 top
R47  3.3k  [0402-RES]  30.11,589.09 0 top
R48  180  [0402-RES]  25.25,587.52 180 top
R49  180  [0402-RES]  25.22,588.73 180 top
R50  10k  [0402-RES]  33.18,589.1 0 top
R51  10k  [0402-RES]  17.53,585.34 90 bottom
R52  10k  [0402-RES]  15.89,580.16 270 top
R53  10k  [0402-RES]  30.6,583.35 90 bottom
R54  180  [0402-RES]  23.4,577.2 0 bottom
R55  1k  [0402-RES]  20.3,577.21 0 bottom
R56  10k  [0402-RES]  27.81,577.78 180 bottom
R57  3.3k  [0402-RES]  16.07,580.36 0 bottom
R58  331  [0402-RES]  15.18,576.16 270 bottom
R59  0  [0603-RES]  28.24,580.72 0 top
R60  0  [0603-RES]  27.61,591.28 180 bottom
R61  0  [0603-RES]  33.68,579.49 0 top
R62  0  [0603-RES]  19.46,592.33 270 bottom
R63  DNP  [0603-RES]  24.92,591.8 90 bottom
R64  10k  [0402-RES]  17.73,576.2 270 top
R65  0  [0603-RES]  29.02,578.16 90 top
R66  0  [0603-RES]  22.05,591.81 90 bottom
R67  100k  [0402-RES]  583.96,587.81 270 top
R68  3.3k  [0402-RES]  587.79,569.9 270 top
R69  3.3k  [0402-RES]  589.09,569.89 270 top
R70  180  [0402-RES]  587.52,574.75 90 top
R71  180  [0402-RES]  588.73,574.78 90 top
R72  10k  [0402-RES]  589.1,566.82 270 top
R73  10k  [0402-RES]  585.34,582.47 180 bottom
R74  10k  [0402-RES]  580.16,584.11 180 top
R75  10k  [0402-RES]  583.35,569.4 180 bottom
R76  180  [0402-RES]  577.2,576.6 90 bottom
R77  1k  [0402-RES]  577.21,579.7 90 bottom
R78  10k  [0402-RES]  577.78,572.19 270 bottom
R79  3.3k  [0402-RES]  580.36,583.93 90 bottom
R80  331  [0402-RES]  576.16,584.82 0 bottom
R81  0  [0603-RES]  580.72,571.76 270 top
R82  0  [0603-RES]  591.28,572.39 270 bottom
R83  0  [0603-RES]  579.49,566.32 270 top
R84  0  [0603-RES]  592.33,580.54 0 bottom
R85  DNP  [0603-RES]  591.8,575.08 180 bottom
R86  10k  [0402-RES]  576.2,582.27 180 top
R87  0  [0603-RES]  578.16,570.98 0 top
R88  0  [0603-RES]  591.81,577.95 180 bottom
R111  100k  [0402-RES]  16.04,12.19 90 top
R112  3.3k  [0402-RES]  12.21,30.1 90 top
R113  3.3k  [0402-RES]  10.91,30.11 90 top
R114  180  [0402-RES]  12.48,25.25 270 top
R115  180  [0402-RES]  11.27,25.22 270 top
R116  10k  [0402-RES]  10.9,33.18 90 top
R117  10k  [0402-RES]  14.66,17.53 0 bottom
R118  10k  [0402-RES]  19.84,15.89 0 top
R119  10k  [0402-RES]  16.65,30.6 0 bottom
R120  180  [0402-RES]  22.8,23.4 270 bottom
R121  1k  [0402-RES]  22.79,20.3 270 bottom
R122  10k  [0402-RES]  22.22,27.81 90 bottom
R123  3.3k  [0402-RES]  19.64,16.07 270 bottom
R124  331  [0402-RES]  23.84,15.18 180 bottom
R125  0  [0603-RES]  19.28,28.24 90 top
R126  0  [0603-RES]  8.72,27.61 90 bottom
R127  0  [0603-RES]  20.51,33.68 90 top
R128  0  [0603-RES]  7.67,19.46 180 bottom
R129  DNP  [0603-RES]  8.2,24.92 0 bottom
R130  10k  [0402-RES]  23.8,17.73 0 top
R131  0  [0603-RES]  21.84,29.02 180 top
R132  0  [0603-RES]  8.19,22.05 0 bottom
REAR_PANEL1  ALTA_CELL  [ALTA_CELL]  575.05,38.56 180 top
REAR_PANEL2  ALTA_CELL  [ALTA_CELL]  24.95,561.44 0 top
REAR_PANEL3  ALTA_CELL  [ALTA_CELL]  561.44,575.05 270 top
REAR_PANEL5  ALTA_CELL  [ALTA_CELL]  38.56,24.95 90 top
TSX1  TSX-3225  [TSX-3225]  576.85,21.33 90 top
TSX2  TSX-3225  [TSX-3225]  23.15,578.67 270 top
TSX3  TSX-3225  [TSX-3225]  578.67,576.85 180 top
TSX5  TSX-3225  [TSX-3225]  21.33,23.15 0 top
U$1  LV8417CS  [LV8417CS]  582.77,23.11 0 bottom
U$10  JOHANSON_GPS_CHIP  [JOHANSON_GPS_CHIP]  594.98,2.24 0 bottom
U$11  PANASONIC_RECTIFIER  [PANASONIC_RECTIFIER]  587.66,23.46 0 bottom
U$12  PCB_ANTENNA  [PCB_ANTENNA]  554.71,11.61 270 bottom
U$13  MM5329-2700  [MM5829-2700]  568.56,24.16 0 top
U$14  MM5329-2700  [MM5829-2700]  577.72,4.81 180 bottom
U$15  L6920  [L6920]  587.46,22.31 180 top
U$16  HDMID  [HDMID]  599.96,17.05 90 top
U$17  LV8417CS  [LV8417CS]  17.23,576.89 180 bottom
U$18  JOHANSON_GPS_CHIP  [JOHANSON_GPS_CHIP]  5.02,597.76 180 bottom
U$19  PANASONIC_RECTIFIER  [PANASONIC_RECTIFIER]  12.34,576.54 180 bottom
U$20  PCB_ANTENNA  [PCB_ANTENNA]  45.29,588.39 90 bottom
U$21  MM5329-2700  [MM5829-2700]  31.44,575.84 180 top
U$22  MM5329-2700  [MM5829-2700]  22.28,595.19 0 bottom
U$23  L6920  [L6920]  12.54,577.69 0 top
U$24  HDMID  [HDMID]  0.04,582.95 270 top
U$25  LV8417CS  [LV8417CS]  576.89,582.77 270 bottom
U$26  JOHANSON_GPS_CHIP  [JOHANSON_GPS_CHIP]  597.76,594.98 270 bottom
U$27  PANASONIC_RECTIFIER  [PANASONIC_RECTIFIER]  576.54,587.66 270 bottom
U$28  PCB_ANTENNA  [PCB_ANTENNA]  588.39,554.71 180 bottom
U$29  MM5329-2700  [MM5829-2700]  575.84,568.56 90 top
U$30  MM5329-2700  [MM5829-2700]  595.19,577.72 90 bottom
U$31  L6920  [L6920]  577.69,587.46 270 top
U$32  HDMID  [HDMID]  582.95,599.96 180 top
U$41  LV8417CS  [LV8417CS]  23.11,17.23 90 bottom
U$42  JOHANSON_GPS_CHIP  [JOHANSON_GPS_CHIP]  2.24,5.02 90 bottom
U$43  PANASONIC_RECTIFIER  [PANASONIC_RECTIFIER]  23.46,12.34 90 bottom
U$44  PCB_ANTENNA  [PCB_ANTENNA]  11.61,45.29 0 bottom
U$45  MM5329-2700  [MM5829-2700]  24.16,31.44 270 top
U$46  MM5329-2700  [MM5829-2700]  4.81,22.28 270 bottom
U$47  L6920  [L6920]  22.31,12.54 90 top
U$48  HDMID  [HDMID]  17.05,0.04 0 top

## Library data of the parts
32.1-32.3 32.5 = FC-135
BALUN1-BALUN3 BALUN5 = JOHANSON_BALUN
C21 C24 C25 C27-C92 C116-C138 L5-L16 L21-L24 LED4-LED12 LED16-LED18 R23-R88 R111-R132 = SparkFun
FRONT_PANEL1-FRONT_PANEL3 FRONT_PANEL5 REAR_PANEL1-REAR_PANEL3 REAR_PANEL5 = ALTA_CELL
GPS1-GPS3 GPS5 = VENUS838FLPX
IMU1-IMU3 IMU5 = SparkFun-Sensors; PROD_ID: IC-12536
LS3-LS8 LS11 LS12 = SparkFun-Sensors; PROD_ID: IC-11836
MICROCONTROLLER1-MICROCONTROLLER3 MICROCONTROLLER5 = CC1310RGZ48
TSX1-TSX3 TSX5 = TSX-3225
U$1 U$17 U$25 U$41 = LV8417CS
U$10 U$18 U$26 U$42 = johanson_gps_chip
U$11 U$19 U$27 U$43 = Panasonic_Rectifier
U$12 U$20 U$28 U$44 = PCB_ANTENNA
U$13 U$14 U$21 U$22 U$29 U$30 U$45 U$46 = MM5329-2700
U$15 U$23 U$31 U$47 = L6920
U$16 U$24 U$32 U$48 = HDMID

## Nets
ACCEL_INT: IMU1.12 IMU2.12 IMU3.12 IMU5.12 MICROCONTROLLER1.18 MICROCONTROLLER2.18 MICROCONTROLLER3.18 MICROCONTROLLER5.18
ADC0: LS3.E LS5.E LS7.E LS11.E MICROCONTROLLER1.36 MICROCONTROLLER2.36 MICROCONTROLLER3.36 MICROCONTROLLER5.36 R29.1 R51.1 R73.1 R117.1
ADC1: LS4.E LS6.E LS8.E LS12.E MICROCONTROLLER1.37 MICROCONTROLLER2.37 MICROCONTROLLER3.37 MICROCONTROLLER5.37 R30.1 R52.1 R74.1 R118.1
ANTENNA1: C43.2 R39.2 U$12.1 U$12.2 U$12.3 U$12.4 U$12.5 U$12.6 U$12.7 U$12.8 U$12.9 U$12.10 U$12.11 U$12.12 U$12.13 U$12.14 U$12.15 U$12.16 U$12.17 U$12.18 U$12.19 U$12.ANTENNA
ANTENNA2: C66.2 R61.2 U$20.1 U$20.2 U$20.3 U$20.4 U$20.5 U$20.6 U$20.7 U$20.8 U$20.9 U$20.10 U$20.11 U$20.12 U$20.13 U$20.14 U$20.15 U$20.16 U$20.17 U$20.18 U$20.19 U$20.ANTENNA
ANTENNA3: C89.2 R83.2 U$28.1 U$28.2 U$28.3 U$28.4 U$28.5 U$28.6 U$28.7 U$28.8 U$28.9 U$28.10 U$28.11 U$28.12 U$28.13 U$28.14 U$28.15 U$28.16 U$28.17 U$28.18 U$28.19 U$28.ANTENNA
ANTENNA5: C135.2 R127.2 U$44.1 U$44.2 U$44.3 U$44.4 U$44.5 U$44.6 U$44.7 U$44.8 U$44.9 U$44.10 U$44.11 U$44.12 U$44.13 U$44.14 U$44.15 U$44.16 U$44.17 U$44.18 U$44.19 U$44.ANTENNA
COIL: R36.2 R58.2 R80.2 R124.2 U$1.OUT2 U$11.C1 U$11.C2 U$17.OUT2 U$19.C1 U$19.C2 U$25.OUT2 U$27.C1 U$27.C2 U$41.OUT2 U$43.C1 U$43.C2
DCDC_SW: L5.1 L9.1 L13.1 L21.1 MICROCONTROLLER1.33 MICROCONTROLLER2.33 MICROCONTROLLER3.33 MICROCONTROLLER5.33
GLED: MICROCONTROLLER1.12 MICROCONTROLLER2.12 MICROCONTROLLER3.12 MICROCONTROLLER5.12 R27.2 R49.2 R71.2 R115.2
GND: BALUN1.5 BALUN1.6 BALUN2.5 BALUN2.6 BALUN3.5 BALUN3.6 BALUN5.5 BALUN5.6 C21.2 C24.2 C25.2 C27.2 C28.2 C29.2 C30.2 C31.2 C32.2 C33.2 C34.2 C35.2 C36.2 C37.2 C38.2 C39.2 C40.2 C41.2 C43.1 C44.2 C45.2 C46.2 C47.2 C48.2 C49.2 C50.2 C51.2 C52.2 C53.2 C54.2 C55.2 C56.2 C57.2 C58.2 C59.2 C60.2 C61.2 C62.2 C63.2 C64.2 C66.1 C67.2 C68.2 C69.2 C70.2 C71.2 C72.2 C73.2 C74.2 C75.2 C76.2 C77.2 C78.2 C79.2 C80.2 C81.2 C82.2 C83.2 C84.2 C85.2 C86.2 C87.2 C89.1 C90.2 C91.2 C92.2 C116.2 C117.2 C118.2 C119.2 C120.2 C121.2 C122.2 C123.2 C124.2 C125.2 C126.2 C127.2 C128.2 C129.2 C130.2 C131.2 C132.2 C133.2 C135.1 C136.2 C137.2 C138.2 FRONT_PANEL1.- FRONT_PANEL2.- FRONT_PANEL3.- FRONT_PANEL5.- GPS1.10 GPS1.11 GPS1.15 GPS1.19 GPS1.21 GPS1.22 GPS1.24 GPS1.25 GPS1.27 GPS1.28 GPS1.29 GPS1.31 GPS1.33 GPS1.49 GPS1.60 GPS1.61 GPS1.62 GPS1.64 GPS1.65 GPS1.69 GPS2.10 GPS2.11 GPS2.15 GPS2.19 GPS2.21 GPS2.22 GPS2.24 GPS2.25 GPS2.27 GPS2.28 GPS2.29 GPS2.31 GPS2.33 GPS2.49 GPS2.60 GPS2.61 GPS2.62 GPS2.64 GPS2.65 GPS2.69 GPS3.10 GPS3.11 GPS3.15 GPS3.19 GPS3.21 GPS3.22 GPS3.24 GPS3.25 GPS3.27 GPS3.28 GPS3.29 GPS3.31 GPS3.33 GPS3.49 GPS3.60 GPS3.61 GPS3.62 GPS3.64 GPS3.65 GPS3.69 GPS5.10 GPS5.11 GPS5.15 GPS5.19 GPS5.21 GPS5.22 GPS5.24 GPS5.25 GPS5.27 GPS5.28 GPS5.29 GPS5.31 GPS5.33 GPS5.49 GPS5.60 GPS5.61 GPS5.62 GPS5.64 GPS5.65 GPS5.69 IMU1.14 IMU1.15 IMU1.16 IMU1.17 IMU1.18 IMU1.19 IMU1.20 IMU2.14 IMU2.15 IMU2.16 IMU2.17 IMU2.18 IMU2.19 IMU2.20 IMU3.14 IMU3.15 IMU3.16 IMU3.17 IMU3.18 IMU3.19 IMU3.20 IMU5.14 IMU5.15 IMU5.16 IMU5.17 IMU5.18 IMU5.19 IMU5.20 L6.2 L7.1 L10.2 L11.1 L14.2 L15.1 L22.2 L23.1 LED4.C LED5.C LED7.C LED8.C LED10.C LED11.C LED16.C LED17.C MICROCONTROLLER1.32 MICROCONTROLLER1.49 MICROCONTROLLER2.32 MICROCONTROLLER2.49 MICROCONTROLLER3.32 MICROCONTROLLER3.49 MICROCONTROLLER5.32 MICROCONTROLLER5.49 R29.2 R30.2 R41.2 R51.2 R52.2 R63.2 R73.2 R74.2 R85.2 R117.2 R118.2 R129.2 REAR_PANEL1.- REAR_PANEL2.- REAR_PANEL3.- REAR_PANEL5.- TSX1.2 TSX1.4 TSX2.2 TSX2.4 TSX3.2 TSX3.4 TSX5.2 TSX5.4 U$1.PGND U$1.SGND U$11.GND U$13.GND1 U$13.GND2 U$13.GND3 U$14.GND1 U$14.GND2 U$14.GND3 U$15.6 U$16.1 U$16.FOOT1 U$16.FOOT2 U$16.FOOT3 U$16.FOOT4 U$17.PGND U$17.SGND U$19.GND U$21.GND1 U$21.GND2 U$21.GND3 U$22.GND1 U$22.GND2 U$22.GND3 U$23.6 U$24.1 U$24.FOOT1 U$24.FOOT2 U$24.FOOT3 U$24.FOOT4 U$25.PGND U$25.SGND U$27.GND U$29.GND1 U$29.GND2 U$29.GND3 U$30.GND1 U$30.GND2 U$30.GND3 U$31.6 U$32.1 U$32.FOOT1 U$32.FOOT2 U$32.FOOT3 U$32.FOOT4 U$41.PGND U$41.SGND U$43.GND U$45.GND1 U$45.GND2 U$45.GND3 U$46.GND1 U$46.GND2 U$46.GND3 U$47.6 U$48.1 U$48.FOOT1 U$48.FOOT2 U$48.FOOT3 U$48.FOOT4
GYRO_INT: IMU1.11 IMU2.11 IMU3.11 IMU5.11 MICROCONTROLLER1.19 MICROCONTROLLER2.19 MICROCONTROLLER3.19 MICROCONTROLLER5.19
JTAG_TCKC: MICROCONTROLLER1.25 MICROCONTROLLER2.25 MICROCONTROLLER3.25 MICROCONTROLLER5.25 U$16.14 U$16.15 U$24.14 U$24.15 U$32.14 U$32.15 U$48.14 U$48.15
JTAG_TMSC: MICROCONTROLLER1.24 MICROCONTROLLER2.24 MICROCONTROLLER3.24 MICROCONTROLLER5.24 U$16.16 U$16.17 U$24.16 U$24.17 U$32.16 U$32.17 U$48.16 U$48.17
MAG_INT: IMU1.9 IMU2.9 IMU3.9 IMU5.9 MICROCONTROLLER1.20 MICROCONTROLLER2.20 MICROCONTROLLER3.20 MICROCONTROLLER5.20
N$49: C33.1 MICROCONTROLLER1.23
N$50: 32.1.P2 C34.1 MICROCONTROLLER1.4
N$51: 32.1.P1 C35.1 MICROCONTROLLER1.5
N$52: LED4.A R26.1
N$53: LED5.A R27.1
N$54: C39.1 IMU1.21
N$55: C40.1 IMU1.24
N$56: IMU1.5 IMU1.6 IMU1.7 IMU1.8 R28.2
N$57: GPS1.42 R31.1
N$58: LED6.C R32.2
N$59: GPS1.9 R33.1
N$60: C41.1 GPS1.1 R34.2
N$61: R35.1 U$1.ENA
N$62: R36.1 U$1.OUT1
N$63: BALUN1.4 MICROCONTROLLER1.1
N$64: BALUN1.3 MICROCONTROLLER1.2
N$65: BALUN1.2 MICROCONTROLLER1.3
N$66: BALUN1.1 C42.2
N$67: L6.1 R37.2 R39.1 R43.2
N$68: C42.1 R37.1
N$69: GPS1.32 R38.2
N$70: R38.1 R40.2 R41.1 R44.1
N$71: L7.2 R40.1 U$10.SIG
N$72: R42.1 U$15.5
N$73: L8.1 U$15.7
N$74: R44.2 U$14.SIG
N$75: R43.1 U$13.SIG
N$97: C56.1 MICROCONTROLLER2.23
N$98: 32.2.P2 C57.1 MICROCONTROLLER2.4
N$99: 32.2.P1 C58.1 MICROCONTROLLER2.5
N$100: LED7.A R48.1
N$101: LED8.A R49.1
N$102: C62.1 IMU2.21
N$103: C63.1 IMU2.24
N$104: IMU2.5 IMU2.6 IMU2.7 IMU2.8 R50.2
N$105: GPS2.42 R53.1
N$106: LED9.C R54.2
N$107: GPS2.9 R55.1
N$108: C64.1 GPS2.1 R56.2
N$109: R57.1 U$17.ENA
N$110: R58.1 U$17.OUT1
N$111: BALUN2.4 MICROCONTROLLER2.1
N$112: BALUN2.3 MICROCONTROLLER2.2
N$113: BALUN2.2 MICROCONTROLLER2.3
N$114: BALUN2.1 C65.2
N$115: L10.1 R59.2 R61.1 R65.2
N$116: C65.1 R59.1
N$117: GPS2.32 R60.2
N$118: R60.1 R62.2 R63.1 R66.1
N$119: L11.2 R62.1 U$18.SIG
N$120: R64.1 U$23.5
N$121: L12.1 U$23.7
N$122: R66.2 U$22.SIG
N$123: R65.1 U$21.SIG
N$145: C79.1 MICROCONTROLLER3.23
N$146: 32.3.P2 C80.1 MICROCONTROLLER3.4
N$147: 32.3.P1 C81.1 MICROCONTROLLER3.5
N$148: LED10.A R70.1
N$149: LED11.A R71.1
N$150: C85.1 IMU3.21
N$151: C86.1 IMU3.24
N$152: IMU3.5 IMU3.6 IMU3.7 IMU3.8 R72.2
N$153: GPS3.42 R75.1
N$154: LED12.C R76.2
N$155: GPS3.9 R77.1
N$156: C87.1 GPS3.1 R78.2
N$157: R79.1 U$25.ENA
N$158: R80.1 U$25.OUT1
N$159: BALUN3.4 MICROCONTROLLER3.1
N$160: BALUN3.3 MICROCONTROLLER3.2
N$161: BALUN3.2 MICROCONTROLLER3.3
N$162: BALUN3.1 C88.2
N$163: L14.1 R81.2 R83.1 R87.2
N$164: C88.1 R81.1
N$165: GPS3.32 R82.2
N$166: R82.1 R84.2 R85.1 R88.1
N$167: L15.2 R84.1 U$26.SIG
N$168: R86.1 U$31.5
N$169: L16.1 U$31.7
N$170: R88.2 U$30.SIG
N$171: R87.1 U$29.SIG
N$241: C125.1 MICROCONTROLLER5.23
N$242: 32.5.P2 C126.1 MICROCONTROLLER5.4
N$243: 32.5.P1 C127.1 MICROCONTROLLER5.5
N$244: LED16.A R114.1
N$245: LED17.A R115.1
N$246: C131.1 IMU5.21
N$247: C132.1 IMU5.24
N$248: IMU5.5 IMU5.6 IMU5.7 IMU5.8 R116.2
N$249: GPS5.42 R119.1
N$250: LED18.C R120.2
N$251: GPS5.9 R121.1
N$252: C133.1 GPS5.1 R122.2
N$253: R123.1 U$41.ENA
N$254: R124.1 U$41.OUT1
N$255: BALUN5.4 MICROCONTROLLER5.1
N$256: BALUN5.3 MICROCONTROLLER5.2
N$257: BALUN5.2 MICROCONTROLLER5.3
N$258: BALUN5.1 C134.2
N$259: L22.1 R125.2 R127.1 R131.2
N$260: C134.1 R125.1
N$261: GPS5.32 R126.2
N$262: R126.1 R128.2 R129.1 R132.1
N$263: L23.2 R128.1 U$42.SIG
N$264: R130.1 U$47.5
N$265: L24.1 U$47.7
N$266: R132.2 U$46.SIG
N$267: R131.1 U$45.SIG
NAV: GPS1.7 GPS2.7 GPS3.7 GPS5.7 MICROCONTROLLER1.6 MICROCONTROLLER2.6 MICROCONTROLLER3.6 MICROCONTROLLER5.6 R32.1 R54.1 R76.1 R120.1
PWM1: MICROCONTROLLER1.40 MICROCONTROLLER2.40 MICROCONTROLLER3.40 MICROCONTROLLER5.40 U$1.IN1 U$17.IN1 U$25.IN1 U$41.IN1
PWM2: MICROCONTROLLER1.41 MICROCONTROLLER2.41 MICROCONTROLLER3.41 MICROCONTROLLER5.41 U$1.IN2 U$17.IN2 U$25.IN2 U$41.IN2
RESET: C21.1 C47.1 C70.1 C116.1 MICROCONTROLLER1.35 MICROCONTROLLER2.35 MICROCONTROLLER3.35 MICROCONTROLLER5.35 R23.1 R45.1 R67.1 R111.1 U$16.6 U$16.7 U$24.6 U$24.7 U$32.6 U$32.7 U$48.6 U$48.7
RLED: MICROCONTROLLER1.11 MICROCONTROLLER2.11 MICROCONTROLLER3.11 MICROCONTROLLER5.11 R26.2 R48.2 R70.2 R114.2
RXD: GPS1.44 GPS2.44 GPS3.44 GPS5.44 MICROCONTROLLER1.7 MICROCONTROLLER2.7 MICROCONTROLLER3.7 MICROCONTROLLER5.7 U$16.2 U$16.3 U$24.2 U$24.3 U$32.2 U$32.3 U$48.2 U$48.3
SCL: IMU1.2 IMU2.2 IMU3.2 IMU5.2 MICROCONTROLLER1.9 MICROCONTROLLER2.9 MICROCONTROLLER3.9 MICROCONTROLLER5.9 R24.1 R46.1 R68.1 R112.1
SDA: IMU1.4 IMU2.4 IMU3.4 IMU5.4 MICROCONTROLLER1.10 MICROCONTROLLER2.10 MICROCONTROLLER3.10 MICROCONTROLLER5.10 R25.1 R47.1 R69.1 R113.1
SOLAR_CELLS: C45.1 C68.1 C91.1 C137.1 FRONT_PANEL1.+ FRONT_PANEL2.+ FRONT_PANEL3.+ FRONT_PANEL5.+ L8.2 L12.2 L16.2 L24.2 R42.2 R64.2 R86.2 R130.2 REAR_PANEL1.+ REAR_PANEL2.+ REAR_PANEL3.+ REAR_PANEL5.+
SWO: MICROCONTROLLER1.28 MICROCONTROLLER2.28 MICROCONTROLLER3.28 MICROCONTROLLER5.28 U$16.8 U$16.9 U$24.8 U$24.9 U$32.8 U$32.9 U$48.8 U$48.9
TDI: MICROCONTROLLER1.27 MICROCONTROLLER2.27 MICROCONTROLLER3.27 MICROCONTROLLER5.27 U$16.10 U$16.11 U$24.10 U$24.11 U$32.10 U$32.11 U$48.10 U$48.11
TDO: MICROCONTROLLER1.26 MICROCONTROLLER2.26 MICROCONTROLLER3.26 MICROCONTROLLER5.26 U$16.12 U$16.13 U$24.12 U$24.13 U$32.12 U$32.13 U$48.12 U$48.13
TXD: MICROCONTROLLER1.8 MICROCONTROLLER2.8 MICROCONTROLLER3.8 MICROCONTROLLER5.8 R31.2 R53.2 R75.2 R119.2 U$16.4 U$16.5 U$24.4 U$24.5 U$32.4 U$32.5 U$48.4 U$48.5
VDDR: C30.1 C31.1 C32.1 C53.1 C54.1 C55.1 C76.1 C77.1 C78.1 C122.1 C123.1 C124.1 L5.2 L9.2 L13.2 L21.2 MICROCONTROLLER1.45 MICROCONTROLLER1.48 MICROCONTROLLER2.45 MICROCONTROLLER2.48 MICROCONTROLLER3.45 MICROCONTROLLER3.48 MICROCONTROLLER5.45 MICROCONTROLLER5.48
VDDS: C24.1 C25.1 C27.1 C28.1 C29.1 C36.1 C37.1 C38.1 C44.1 C46.1 C48.1 C49.1 C50.1 C51.1 C52.1 C59.1 C60.1 C61.1 C67.1 C69.1 C71.1 C72.1 C73.1 C74.1 C75.1 C82.1 C83.1 C84.1 C90.1 C92.1 C117.1 C118.1 C119.1 C120.1 C121.1 C128.1 C129.1 C130.1 C136.1 C138.1 GPS1.2 GPS1.18 GPS1.58 GPS2.2 GPS2.18 GPS2.58 GPS3.2 GPS3.18 GPS3.58 GPS5.2 GPS5.18 GPS5.58 IMU1.1 IMU1.3 IMU1.22 IMU1.23 IMU2.1 IMU2.3 IMU2.22 IMU2.23 IMU3.1 IMU3.3 IMU3.22 IMU3.23 IMU5.1 IMU5.3 IMU5.22 IMU5.23 LED6.A LED9.A LED12.A LED18.A LS3.C LS4.C LS5.C LS6.C LS7.C LS8.C LS11.C LS12.C MICROCONTROLLER1.13 MICROCONTROLLER1.22 MICROCONTROLLER1.34 MICROCONTROLLER1.44 MICROCONTROLLER2.13 MICROCONTROLLER2.22 MICROCONTROLLER2.34 MICROCONTROLLER2.44 MICROCONTROLLER3.13 MICROCONTROLLER3.22 MICROCONTROLLER3.34 MICROCONTROLLER3.44 MICROCONTROLLER5.13 MICROCONTROLLER5.22 MICROCONTROLLER5.34 MICROCONTROLLER5.44 R23.2 R24.2 R25.2 R28.1 R33.2 R34.1 R35.2 R45.2 R46.2 R47.2 R50.1 R55.2 R56.1 R57.2 R67.2 R68.2 R69.2 R72.1 R77.2 R78.1 R79.2 R111.2 R112.2 R113.2 R116.1 R121.2 R122.1 R123.2 U$1.VCC U$1.VM U$11.VCC U$15.1 U$15.8 U$16.18 U$16.19 U$17.VCC U$17.VM U$19.VCC U$23.1 U$23.8 U$24.18 U$24.19 U$25.VCC U$25.VM U$27.VCC U$31.1 U$31.8 U$32.18 U$32.19 U$41.VCC U$41.VM U$43.VCC U$47.1 U$47.8 U$48.18 U$48.19
X24M_N: MICROCONTROLLER1.46 MICROCONTROLLER2.46 MICROCONTROLLER3.46 MICROCONTROLLER5.46 TSX1.3 TSX2.3 TSX3.3 TSX5.3
X24M_P: MICROCONTROLLER1.47 MICROCONTROLLER2.47 MICROCONTROLLER3.47 MICROCONTROLLER5.47 TSX1.1 TSX2.1 TSX3.1 TSX5.1

## Tracks (layer width: path | path; a pad name or v marks a point on that pad's centre or on a via)
ACCEL_INT  (3 unrouted)
  Top 0.152: MICROCONTROLLER1.18 580.01,2.75 579.16,1.9 565.91,1.9 565.72,2.1 565.72,2.56 565.86,2.69 566.11,2.69 IMU1.12 | MICROCONTROLLER3.18 597.25,580.01 598.1,579.16 598.1,565.91 597.9,565.72 597.45,565.72 597.31,565.86 597.31,566.11 IMU3.12 | MICROCONTROLLER2.18 19.99,597.25 20.84,598.1 34.09,598.1 34.28,597.9 34.28,597.45 34.15,597.31 33.89,597.31 IMU2.12 | MICROCONTROLLER5.18 2.75,19.99 1.9,20.84 1.9,34.09 2.1,34.28 2.56,34.28 2.69,34.15 2.69,33.89 IMU5.12
ADC0  (via drill 0.35)  (3 unrouted)
  Top 0.152: MICROCONTROLLER1.36 584.85,17.76 v585.17,18.08 | MICROCONTROLLER3.36 582.24,584.85 v581.92,585.17 | MICROCONTROLLER2.36 15.15,582.24 v14.83,581.92 | MICROCONTROLLER5.36 17.76,15.15 v18.08,14.83
  Bottom 0.152: 584.91,17.82 v585.17,18.08 583.82,16.73 LS3.E 582.49,15.29 arc-90 R29.1 | 582.18,584.91 v581.92,585.17 583.27,583.82 LS7.E 584.71,582.49 arc-90 R73.1 | 15.09,582.18 v14.83,581.92 16.18,583.27 LS5.E 17.51,584.71 arc-90 R51.1 | 17.82,15.09 v18.08,14.83 16.73,16.18 LS11.E 15.29,17.51 arc-90 R117.1
ADC1  (3 unrouted)
  Top 0.152: MICROCONTROLLER1.37 583.28,18.36 R30.1 584.12,19.2 LS4.E | MICROCONTROLLER3.37 581.64,583.28 R74.1 580.8,584.12 LS8.E | MICROCONTROLLER2.37 16.72,581.64 R52.1 15.88,580.8 LS6.E | MICROCONTROLLER5.37 18.36,16.72 R118.1 19.2,15.88 LS12.E
ANTENNA1
  Top 0.152: 565.5,20.54 565.6,20.56
  Top 0.254: R39.2 565.5,20.54
  Top 0.508: 565.6,20.56 565.6,21.84 C43.2
  Top 1.016: U$12.2 U$12.3 | U$12.4 U$12.5 | U$12.6 U$12.7 | U$12.8 U$12.9 | U$12.10 U$12.11 | U$12.12 U$12.13 | U$12.14 U$12.15 | U$12.16 U$12.17 | U$12.18 U$12.19 | U$12.1 U$12.ANTENNA R39.2 565.45,20.49
  Bottom 1.016: U$12.1 552.63,19.5 556.6,19.5 U$12.2 | U$12.3 552.62,17.48 556.62,17.48 U$12.4 | U$12.5 552.64,15.46 556.66,15.46 557.6,14.52 U$12.6 | U$12.7 552.6,13.5 556.61,13.5 U$12.8 | U$12.9 552.62,11.47 556.64,11.47 557.6,10.51 U$12.10 | U$12.11 552.62,9.48 556.62,9.48 U$12.12 | U$12.12 | U$12.13 552.61,7.49 556.62,7.49 U$12.14 | U$12.15 552.62,5.48 556.63,5.48 U$12.16 | U$12.17 552.64,3.45 556.66,3.45 557.6,2.52 U$12.18
ANTENNA2
  Top 0.152: 34.5,579.46 34.4,579.44
  Top 0.254: R61.2 34.5,579.46
  Top 0.508: 34.4,579.44 34.4,578.16 C66.2
  Top 1.016: U$20.2 U$20.3 | U$20.4 U$20.5 | U$20.6 U$20.7 | U$20.8 U$20.9 | U$20.10 U$20.11 | U$20.12 U$20.13 | U$20.14 U$20.15 | U$20.16 U$20.17 | U$20.18 U$20.19 | U$20.1 U$20.ANTENNA R61.2 34.55,579.51
  Bottom 1.016: U$20.1 47.37,580.5 43.4,580.5 U$20.2 | U$20.3 47.38,582.52 43.38,582.52 U$20.4 | U$20.5 47.36,584.54 43.34,584.54 42.4,585.48 U$20.6 | U$20.7 47.4,586.5 43.4,586.5 U$20.8 | U$20.9 47.38,588.53 43.36,588.53 42.4,589.49 U$20.10 | U$20.11 47.38,590.52 43.38,590.52 U$20.12 | U$20.12 | U$20.13 47.39,592.51 43.38,592.51 U$20.14 | U$20.15 47.38,594.52 43.37,594.52 U$20.16 | U$20.17 47.36,596.55 43.34,596.55 42.4,597.48 U$20.18
ANTENNA3
  Top 0.152: 579.46,565.5 579.44,565.6
  Top 0.254: R83.2 579.46,565.5
  Top 0.508: 579.44,565.6 578.16,565.6 C89.2
  Top 1.016: U$28.2 U$28.3 | U$28.4 U$28.5 | U$28.6 U$28.7 | U$28.8 U$28.9 | U$28.10 U$28.11 | U$28.12 U$28.13 | U$28.14 U$28.15 | U$28.16 U$28.17 | U$28.18 U$28.19 | U$28.1 U$28.ANTENNA R83.2 579.51,565.45
  Bottom 1.016: U$28.1 580.5,552.63 580.5,556.6 U$28.2 | U$28.3 582.52,552.62 582.52,556.62 U$28.4 | U$28.5 584.54,552.64 584.54,556.66 585.48,557.6 U$28.6 | U$28.7 586.5,552.6 586.5,556.61 U$28.8 | U$28.9 588.53,552.62 588.53,556.64 589.49,557.6 U$28.10 | U$28.11 590.52,552.62 590.52,556.62 U$28.12 | U$28.12 | U$28.13 592.51,552.61 592.51,556.62 U$28.14 | U$28.15 594.52,552.62 594.52,556.63 U$28.16 | U$28.17 596.55,552.64 596.55,556.66 597.48,557.6 U$28.18
ANTENNA5
  Top 0.152: 20.54,34.5 20.56,34.4
  Top 0.254: R127.2 20.54,34.5
  Top 0.508: 20.56,34.4 21.84,34.4 C135.2
  Top 1.016: U$44.2 U$44.3 | U$44.4 U$44.5 | U$44.6 U$44.7 | U$44.8 U$44.9 | U$44.10 U$44.11 | U$44.12 U$44.13 | U$44.14 U$44.15 | U$44.16 U$44.17 | U$44.18 U$44.19 | U$44.1 U$44.ANTENNA R127.2 20.49,34.55
  Bottom 1.016: U$44.1 19.5,47.37 19.5,43.4 U$44.2 | U$44.3 17.48,47.38 17.48,43.38 U$44.4 | U$44.5 15.46,47.36 15.46,43.34 14.52,42.4 U$44.6 | U$44.7 13.5,47.4 13.5,43.4 U$44.8 | U$44.9 11.47,47.38 11.47,43.36 10.51,42.4 U$44.10 | U$44.11 9.48,47.38 9.48,43.38 U$44.12 | U$44.12 | U$44.13 7.49,47.39 7.49,43.38 U$44.14 | U$44.15 5.48,47.38 5.48,43.37 U$44.16 | U$44.17 3.45,47.36 3.45,43.34 2.52,42.4 U$44.18
COIL  (via drill 0.35)  (3 unrouted)
  Route2 0.152: v593.58,25.87 593.59,24.18 593.59,13.44 586.24,6.1 572.58,6.1 572.53,6.1 566.24,9.65 566.25,10.31 | 566.25,10.31 566.24,10.32 | 566.25,10.31 566.25,24.06 564.12,26.19 561.51,26.19 556.32,31.39 556.32,43.17 558.49,45.34 | 558.49,45.34 558.56,45.41 | 558.49,45.34 592.26,45.34 594.38,43.23 594.38,13.59 586.36,5.58 572.63,5.58 565.7,9.4 565.72,23.87 563.95,25.64 561.41,25.64 555.75,31.31 555.75,43.3 558.31,45.87 592.37,45.87 594.98,43.26 594.98,13.54 586.43,5 572.78,4.99 565.2,9.19 565.2,23.69 563.75,25.14 561.22,25.14 555.12,31.24 555.12,43.44 558.1,46.42 592.6,46.42 595.71,43.31 595.71,13.6 586.53,4.43 572.82,4.46 564.64,8.99 564.63,23.47 563.52,24.58 560.94,24.58 554.43,31.09 554.43,43.67 557.88,47.13 592.89,47.13 596.42,43.45 596.42,13.65 586.59,3.82 574.49,3.82 v573.97,3.3 | v574.13,593.58 575.83,593.59 586.56,593.59 593.9,586.24 593.9,572.58 593.9,572.53 590.35,566.24 589.69,566.25 | 589.69,566.25 589.68,566.24 | 589.69,566.25 575.94,566.25 573.81,564.12 573.81,561.51 568.61,556.32 556.83,556.32 554.66,558.49 | 554.66,558.49 554.59,558.56 | 554.66,558.49 554.66,592.26 556.77,594.38 586.41,594.38 594.42,586.36 594.42,572.63 590.6,565.7 576.13,565.72 574.36,563.95 574.36,561.41 568.69,555.75 556.7,555.75 554.13,558.31 554.13,592.37 556.74,594.98 586.46,594.98 595,586.43 595.01,572.78 590.81,565.2 576.31,565.2 574.86,563.75 574.86,561.22 568.76,555.12 556.56,555.12 553.58,558.1 553.58,592.6 556.69,595.71 586.4,595.71 595.57,586.53 595.54,572.82 591.01,564.64 576.53,564.63 575.42,563.52 575.42,560.94 568.91,554.43 556.33,554.43 552.87,557.88 552.87,592.89 556.55,596.42 586.35,596.42 596.18,586.59 596.18,574.49 v596.7,573.97
  Route2 0.152: v6.42,574.13 6.41,575.83 6.41,586.56 13.76,593.9 27.43,593.9 27.47,593.9 33.76,590.35 33.75,589.69 | 33.75,589.69 33.76,589.68 | 33.75,589.69 33.75,575.94 35.88,573.81 38.48,573.81 43.68,568.61 43.68,556.83 41.52,554.66 | 41.52,554.66 41.44,554.59 | 41.52,554.66 7.74,554.66 5.62,556.77 5.62,586.41 13.64,594.42 27.37,594.42 34.3,590.6 34.28,576.13 36.05,574.36 38.59,574.36 44.26,568.69 44.26,556.7 41.69,554.13 7.63,554.13 5.02,556.74 5.02,586.46 13.56,595 27.22,595.01 34.8,590.81 34.8,576.31 36.25,574.86 38.78,574.86 44.88,568.76 44.88,556.56 41.91,553.58 7.4,553.58 4.29,556.69 4.29,586.4 13.47,595.57 27.18,595.54 35.36,591.01 35.37,576.53 36.48,575.42 39.06,575.42 45.57,568.91 45.57,556.33 42.12,552.87 7.11,552.87 3.58,556.55 3.58,586.35 13.41,596.18 25.51,596.18 v26.04,596.7 | v25.87,6.42 24.18,6.41 13.44,6.41 6.1,13.76 6.1,27.43 6.1,27.47 9.65,33.76 10.31,33.75 | 10.31,33.75 10.32,33.76 | 10.31,33.75 24.06,33.75 26.19,35.88 26.19,38.48 31.39,43.68 43.17,43.68 45.34,41.52 | 45.34,41.52 45.41,41.44 | 45.34,41.52 45.34,7.74 43.23,5.62 13.59,5.62 5.58,13.64 5.58,27.37 9.4,34.3 23.87,34.28 25.64,36.05 25.64,38.59 31.31,44.26 43.3,44.26 45.87,41.69 45.87,7.63 43.26,5.02 13.54,5.02 5,13.56 4.99,27.22 9.19,34.8 23.69,34.8 25.14,36.25 25.14,38.78 31.24,44.88 43.44,44.88 46.42,41.91 46.42,7.4 43.31,4.29 13.6,4.29 4.43,13.47 4.46,27.18 8.99,35.36 23.47,35.37 24.58,36.48 24.58,39.06 31.09,45.57 43.67,45.57 47.13,42.12 47.13,7.11 43.45,3.58 13.65,3.58 3.82,13.41 3.82,25.51 v3.3,26.04
  Route15 0.152: v579.35,25.4 579.35,25.86 581.03,27.54 592.71,27.54 593.78,28.61 593.78,43 591.43,45.34 558.53,45.34 556.31,43.12 556.31,31.5 561.62,26.19 564.12,26.19 566.24,24.07 566.24,9.72 572.53,6.11 586.24,6.09 594.38,14.23 594.38,43.21 591.71,45.88 558.32,45.88 555.74,43.29 555.74,31.33 561.42,25.65 563.94,25.65 565.69,23.9 565.7,9.4 572.63,5.58 586.36,5.58 594.98,14.19 594.98,43.24 591.8,46.42 558.1,46.42 555.11,43.43 555.11,31.25 561.22,25.14 563.75,25.14 565.19,23.7 565.2,9.2 572.79,4.99 586.36,5 595.71,14.34 595.71,43.31 591.89,47.13 557.88,47.13 554.43,43.67 554.42,31.09 560.93,24.59 563.52,24.58 564.63,23.47 564.64,8.99 572.84,4.43 586.54,4.43 596.42,14.31 596.42,43.47 592.13,47.77 557.69,47.77 553.71,43.79 553.71,30.98 560.62,24.08 563.37,24.08 564.08,23.37 564.08,8.81 v573.97,3.3 | v574.6,579.35 574.14,579.35 572.46,581.03 572.46,592.71 571.39,593.78 557,593.78 554.66,591.43 554.66,558.53 556.88,556.31 568.5,556.31 573.81,561.62 573.81,564.12 575.92,566.24 590.28,566.24 593.89,572.53 593.91,586.24 585.77,594.38 556.79,594.38 554.12,591.71 554.12,558.32 556.71,555.74 568.67,555.74 574.35,561.42 574.35,563.94 576.1,565.69 590.6,565.7 594.42,572.63 594.42,586.36 585.81,594.98 556.75,594.98 553.58,591.8 553.58,558.1 556.57,555.11 568.75,555.11 574.86,561.22 574.86,563.75 576.3,565.19 590.8,565.2 595.01,572.79 595,586.36 585.66,595.71 556.69,595.71 552.87,591.89 552.87,557.88 556.33,554.43 568.91,554.42 575.41,560.93 575.42,563.52 576.53,564.63 591.01,564.64 595.57,572.84 595.57,586.54 585.69,596.42 556.53,596.42 552.23,592.13 552.23,557.69 556.21,553.71 569.02,553.71 575.92,560.62 575.92,563.37 576.63,564.08 591.19,564.08 v596.7,573.97
  Route15 0.152: v20.65,574.6 20.65,574.14 18.97,572.46 7.29,572.46 6.22,571.39 6.22,557 8.57,554.66 41.47,554.66 43.69,556.88 43.69,568.5 38.38,573.81 35.88,573.81 33.76,575.92 33.76,590.28 27.47,593.89 13.76,593.91 5.62,585.77 5.62,556.79 8.29,554.12 41.68,554.12 44.26,556.71 44.26,568.67 38.58,574.35 36.06,574.35 34.31,576.1 34.3,590.6 27.36,594.42 13.64,594.42 5.02,585.81 5.02,556.75 8.2,553.58 41.9,553.58 44.89,556.57 44.89,568.75 38.78,574.86 36.25,574.86 34.81,576.3 34.8,590.8 27.21,595.01 13.64,595 4.29,585.66 4.29,556.69 8.11,552.87 42.12,552.87 45.57,556.33 45.58,568.91 39.07,575.41 36.48,575.42 35.37,576.53 35.36,591.01 27.16,595.57 13.46,595.57 3.58,585.69 3.58,556.53 7.87,552.23 42.31,552.23 46.29,556.21 46.29,569.02 39.38,575.92 36.63,575.92 35.92,576.63 35.92,591.19 v26.04,596.7 | v25.4,20.65 25.86,20.65 27.54,18.97 27.54,7.29 28.61,6.22 43,6.22 45.34,8.57 45.34,41.47 43.12,43.69 31.5,43.69 26.19,38.38 26.19,35.88 24.07,33.76 9.72,33.76 6.11,27.47 6.09,13.76 14.23,5.62 43.21,5.62 45.88,8.29 45.88,41.68 43.29,44.26 31.33,44.26 25.65,38.58 25.65,36.06 23.9,34.31 9.4,34.3 5.58,27.36 5.58,13.64 14.19,5.02 43.24,5.02 46.42,8.2 46.42,41.9 43.43,44.89 31.25,44.89 25.14,38.78 25.14,36.25 23.7,34.81 9.2,34.8 4.99,27.21 5,13.64 14.34,4.29 43.31,4.29 47.13,8.11 47.13,42.12 43.67,45.57 31.09,45.58 24.59,39.07 24.58,36.48 23.47,35.37 8.99,35.36 4.43,27.16 4.43,13.46 14.31,3.58 43.47,3.58 47.77,7.87 47.77,42.31 43.79,46.29 30.98,46.29 24.08,39.38 24.08,36.63 23.37,35.92 8.81,35.92 v3.3,26.04
  Bottom 0.152: 580.3,25.4 580.3,25.23 581.92,23.61 U$1.OUT2 | 580.3,25.4 580.3,25.73 580.66,26.09 581.31,26.09 583.42,23.97 585.16,23.97 585.5,23.63 585.5,23.57 U$11.C2 | 580.3,25.4 v579.35,25.4 | 593.47,25.86 v593.58,25.87 v593.57,25.86 591.94,25.86 590.63,24.56 U$11.C1 588.03,24.66 587.3,25.39 585.73,25.39 R36.2 | 574.6,580.3 574.77,580.3 576.39,581.92 U$25.OUT2 | 574.6,580.3 574.27,580.3 573.91,580.66 573.91,581.31 576.03,583.42 576.03,585.16 576.37,585.5 576.43,585.5 U$27.C2 | 574.6,580.3 v574.6,579.35 | 574.14,593.47 v574.13,593.58 v574.13,593.57 574.13,591.94 575.44,590.63 U$27.C1 575.34,588.03 574.61,587.3 574.61,585.73 R80.2 | 19.7,574.6 19.7,574.77 18.08,576.39 U$17.OUT2 | 19.7,574.6 19.7,574.27 19.34,573.91 18.69,573.91 16.58,576.03 14.84,576.03 14.5,576.37 14.5,576.43 U$19.C2 | 19.7,574.6 v20.65,574.6 | 6.53,574.14 v6.42,574.13 v6.43,574.13 8.06,574.13 9.37,575.44 U$19.C1 11.97,575.34 12.7,574.61 14.28,574.61 R58.2 | 25.4,19.7 25.23,19.7 23.61,18.08 U$41.OUT2 | 25.4,19.7 25.73,19.7 26.09,19.34 26.09,18.69 23.97,16.58 23.97,14.84 23.63,14.5 23.57,14.5 U$43.C2 | 25.4,19.7 v25.4,20.65 | 25.86,6.53 v25.87,6.42 v25.86,6.43 25.86,8.06 24.56,9.37 U$43.C1 24.66,11.97 25.39,12.7 25.39,14.28 R124.2
DCDC_SW  (via drill 0.35)  (3 unrouted)
  Top 0.152: 583.85,16.26 MICROCONTROLLER1.33 585.35,16.26 v585.63,15.98 | L5.1 583.39,21.19 v584.03,21.84 | 583.74,583.85 MICROCONTROLLER3.33 583.74,585.35 v584.02,585.63 | L13.1 578.81,583.39 v578.16,584.03 | 16.15,583.74 MICROCONTROLLER2.33 14.65,583.74 v14.37,584.02 | L9.1 16.61,578.81 v15.97,578.16 | 16.26,16.15 MICROCONTROLLER5.33 16.26,14.65 v15.98,14.37 | L21.1 21.19,16.61 v21.84,15.97
  Route2 0.152: v585.63,15.98 585.63,17.68 585.78,17.83 585.78,20.09 v584.03,21.84 | v584.02,585.63 582.32,585.63 582.17,585.78 579.91,585.78 v578.16,584.03 | v14.37,584.02 14.37,582.32 14.22,582.17 14.22,579.91 v15.97,578.16 | v15.98,14.37 17.68,14.37 17.83,14.22 20.09,14.22 v21.84,15.97
  Bottom 0.152: v584.03,21.84 584.16,21.89 | v585.63,15.98 585.98,15.98 | v578.16,584.03 578.11,584.16 | v584.02,585.63 584.02,585.98 | v15.97,578.16 15.84,578.11 | v14.37,584.02 14.02,584.02 | v21.84,15.97 21.89,15.84 | v15.98,14.37 15.98,14.02
GLED  (3 unrouted)
  Top 0.152: R27.2 575.92,11.27 MICROCONTROLLER1.12 | R71.2 588.73,575.92 MICROCONTROLLER3.12 | R49.2 24.08,588.73 MICROCONTROLLER2.12 | R115.2 11.27,24.08 MICROCONTROLLER5.12
GND  (via drill 0.35)  (63 unrouted)
  Top 0.152: MICROCONTROLLER1.49 581.01,15.76 | TSX1.4 TSX1.2 576.05,22.5 574.88,21.32 573.99,21.32 573.64,20.97 573.64,19.87 574.87,18.64 BALUN1.6 BALUN1.5 | MICROCONTROLLER1.32 584.7,15.76 v585.63,14.9 | IMU1.18 568.74,2.44 568.94,2.44 569,2.5 569,2.58 568.94,2.64 568.74,2.64 IMU1.19 | IMU1.14 566.87,2.47 566.87,2.67 566.93,2.73 567.01,2.73 567.07,2.67 567.07,2.47 IMU1.15 567.3,2.47 567.3,2.67 567.36,2.73 567.44,2.73 567.5,2.67 567.5,2.47 IMU1.16 567.73,2.47 567.73,2.67 567.79,2.73 567.87,2.73 567.93,2.67 567.93,2.47 IMU1.17 568.16,2.47 568.16,2.67 568.22,2.73 568.6,2.73 IMU1.19 | IMU1.19 568.51,2.87 568.36,2.87 568.3,2.93 568.3,3.01 568.36,3.07 568.51,3.07 IMU1.20 568.69,3.25 570.76,3.25 574.62,6.85 v579.2,6.84 | C21.2 589.16,17.14 v589.86,16.68 | v576.05,24.15 577.25,24.15 577.77,23.63 578.8,23.63 C32.2 | C35.2 567.78,14.45 567.4,14.07 567.41,14.08 v567,13.65 | 573.95,8.71 573.95,7.84 v573.54,7.31 | C31.2 v580.91,25.48 | U$13.GND1 567.86,24.81 U$13.GND2 569.26,24.81 U$13.GND3 | R30.2 584.76,19.83 585.81,19.83 586.03,19.61 586.03,18.36 586.16,18.23 587.35,18.23 587.38,18.2 | C33.2 588.2,10.29 v588.62,10.71 v588.63,10.71 589.83,10.71 593.32,14.2 U$16.FOOT1 U$16.FOOT3 | U$16.FOOT2 593.9,19.9 593.49,19.48 U$16.1 592.15,18.85 590.4,20.6 590.4,21.6 C45.2 | U$16.FOOT4 U$16.FOOT2 | C46.2 594.83,19.98 U$16.FOOT2 | MICROCONTROLLER3.49 584.24,581.01 | TSX3.4 TSX3.2 577.5,576.05 578.67,574.88 578.67,573.99 579.03,573.64 580.13,573.64 581.36,574.87 BALUN3.6 BALUN3.5 | MICROCONTROLLER3.32 584.24,584.7 v585.1,585.63 | IMU3.18 597.56,568.74 597.56,568.94 597.5,569 597.42,569 597.36,568.94 597.36,568.74 IMU3.19
  Top 0.152: IMU3.14 597.53,566.87 597.33,566.87 597.27,566.93 597.27,567.01 597.33,567.07 597.53,567.07 IMU3.15 597.53,567.3 597.33,567.3 597.27,567.36 597.27,567.44 597.33,567.5 597.53,567.5 IMU3.16 597.53,567.73 597.33,567.73 597.27,567.79 597.27,567.87 597.33,567.93 597.53,567.93 IMU3.17 597.53,568.16 597.33,568.16 597.27,568.22 597.27,568.6 IMU3.19 | IMU3.19 597.13,568.51 597.13,568.36 597.07,568.3 596.99,568.3 596.93,568.36 596.93,568.51 IMU3.20 596.75,568.69 596.75,570.76 593.15,574.62 v593.16,579.2 | C70.2 582.86,589.16 v583.32,589.86 | v575.85,576.05 575.85,577.25 576.37,577.77 576.37,578.8 C78.2 | C81.2 585.55,567.78 585.93,567.4 585.92,567.41 v586.35,567 | 591.29,573.95 592.16,573.95 v592.69,573.54 | C77.2 v574.52,580.91 | U$29.GND1 575.19,567.86 U$29.GND2 575.19,569.26 U$29.GND3 | R74.2 580.17,584.76 580.17,585.81 580.39,586.03 581.64,586.03 581.77,586.16 581.77,587.35 581.8,587.38 | C79.2 589.72,588.2 v589.28,588.62 v589.29,588.63 589.29,589.83 585.8,593.32 U$32.FOOT1 U$32.FOOT3 | U$32.FOOT2 580.1,593.9 580.51,593.49 U$32.1 581.15,592.15 579.4,590.4 578.4,590.4 C91.2 | U$32.FOOT4 U$32.FOOT2 | C92.2 580.02,594.83 U$32.FOOT2 | MICROCONTROLLER2.49 18.99,584.24 | TSX2.4 TSX2.2 23.95,577.5 25.12,578.67 26.01,578.67 26.36,579.03 26.36,580.13 25.13,581.36 BALUN2.6 BALUN2.5 | MICROCONTROLLER2.32 15.3,584.24 v14.37,585.1 | IMU2.18 31.26,597.56 31.06,597.56 31,597.5 31,597.42 31.06,597.36 31.26,597.36 IMU2.19 | IMU2.14 33.13,597.53 33.13,597.33 33.07,597.27 32.99,597.27 32.93,597.33 32.93,597.53 IMU2.15 32.7,597.53 32.7,597.33 32.64,597.27 32.56,597.27 32.5,597.33 32.5,597.53 IMU2.16 32.27,597.53 32.27,597.33 32.21,597.27 32.13,597.27 32.07,597.33 32.07,597.53 IMU2.17 31.84,597.53 31.84,597.33 31.78,597.27 31.4,597.27 IMU2.19
  Top 0.152: IMU2.19 31.49,597.13 31.64,597.13 31.7,597.07 31.7,596.99 31.64,596.93 31.49,596.93 IMU2.20 31.31,596.75 29.24,596.75 25.38,593.15 v20.8,593.16 | C47.2 10.84,582.86 v10.14,583.32 | v23.95,575.85 22.75,575.85 22.23,576.37 21.2,576.37 C55.2 | C58.2 32.22,585.55 32.59,585.93 32.59,585.92 v33,586.35 | 26.05,591.29 26.05,592.16 v26.46,592.69 | C54.2 v19.09,574.52 | U$21.GND1 32.14,575.19 U$21.GND2 30.74,575.19 U$21.GND3 | R52.2 15.24,580.17 14.19,580.17 13.97,580.39 13.97,581.64 13.84,581.77 12.65,581.77 12.62,581.8 | C56.2 11.8,589.72 v11.38,589.28 v11.37,589.29 10.17,589.29 6.68,585.8 U$24.FOOT1 U$24.FOOT3 | U$24.FOOT2 6.1,580.1 6.51,580.51 U$24.1 7.85,581.15 9.6,579.4 9.6,578.4 C68.2 | U$24.FOOT4 U$24.FOOT2 | C69.2 5.17,580.02 U$24.FOOT2 | MICROCONTROLLER5.49 15.76,18.99 | TSX5.4 TSX5.2 22.5,23.95 21.32,25.12 21.32,26.01 20.97,26.36 19.87,26.36 18.64,25.13 BALUN5.6 BALUN5.5 | MICROCONTROLLER5.32 15.76,15.3 v14.9,14.37 | IMU5.18 2.44,31.26 2.44,31.06 2.5,31 2.58,31 2.64,31.06 2.64,31.26 IMU5.19 | IMU5.14 2.47,33.13 2.67,33.13 2.73,33.07 2.73,32.99 2.67,32.93 2.47,32.93 IMU5.15 2.47,32.7 2.67,32.7 2.73,32.64 2.73,32.56 2.67,32.5 2.47,32.5 IMU5.16 2.47,32.27 2.67,32.27 2.73,32.21 2.73,32.13 2.67,32.07 2.47,32.07 IMU5.17 2.47,31.84 2.67,31.84 2.73,31.78 2.73,31.4 IMU5.19 | IMU5.19 2.87,31.49 2.87,31.64 2.93,31.7 3.01,31.7 3.07,31.64 3.07,31.49 IMU5.20 3.25,31.31 3.25,29.24 6.85,25.38 v6.84,20.8 | C116.2 17.14,10.84 v16.68,10.14 | v24.15,23.95 24.15,22.75 23.63,22.23 23.63,21.2 C124.2 | C127.2 14.45,32.22 14.07,32.59 14.08,32.59 v13.65,33 | 8.71,26.05 7.84,26.05 v7.31,26.46
  Top 0.152: C123.2 v25.48,19.09 | U$45.GND1 24.81,32.14 U$45.GND2 24.81,30.74 U$45.GND3 | R118.2 19.83,15.24 19.83,14.19 19.61,13.97 18.36,13.97 18.23,13.84 18.23,12.65 18.2,12.62 | C125.2 10.29,11.8 v10.71,11.38 v10.71,11.37 10.71,10.17 14.2,6.68 U$48.FOOT1 U$48.FOOT3 | U$48.FOOT2 19.9,6.1 19.48,6.51 U$48.1 18.85,7.85 20.6,9.6 21.6,9.6 C137.2 | U$48.FOOT4 U$48.FOOT2 | C138.2 19.98,5.17 U$48.FOOT2